# Allegro board PM25_V2-7_150227_02p.brd
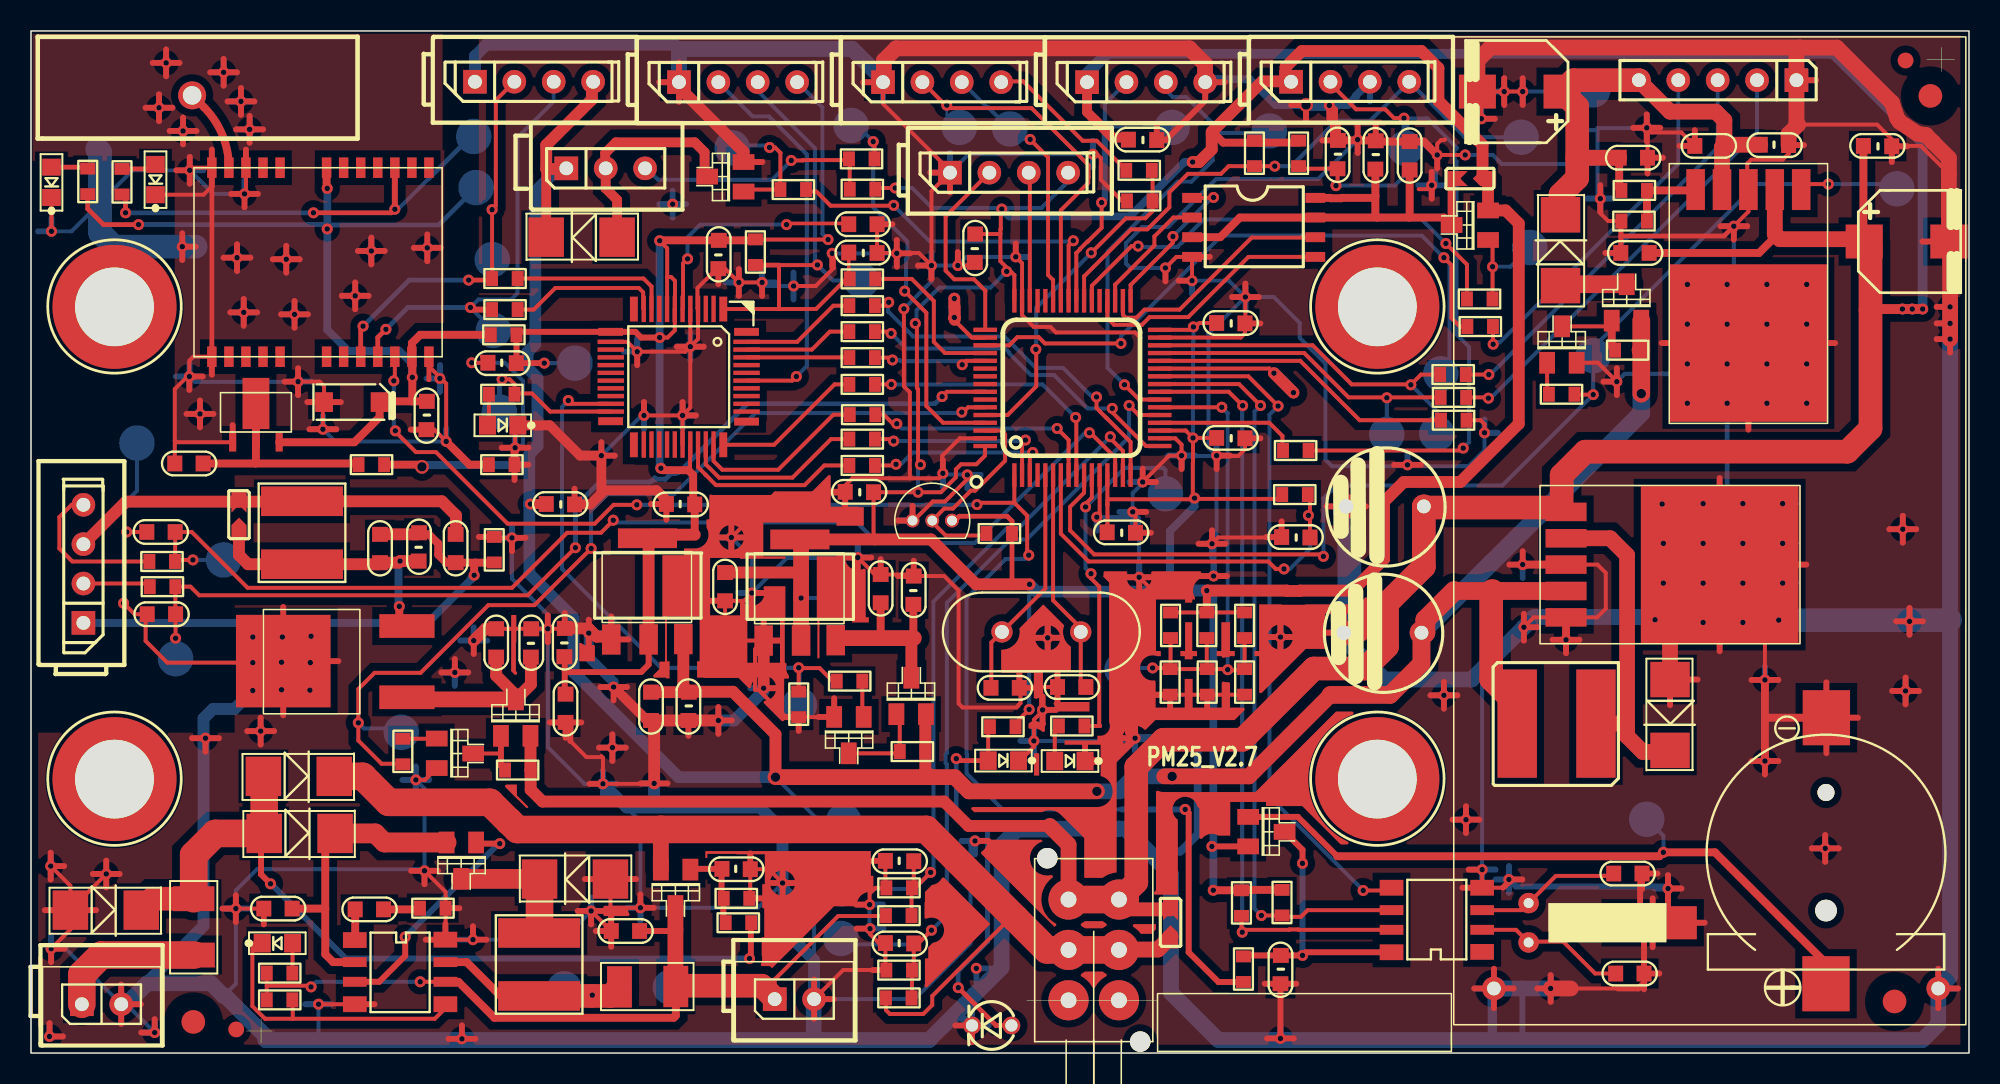
[diagram p0: board, top side]
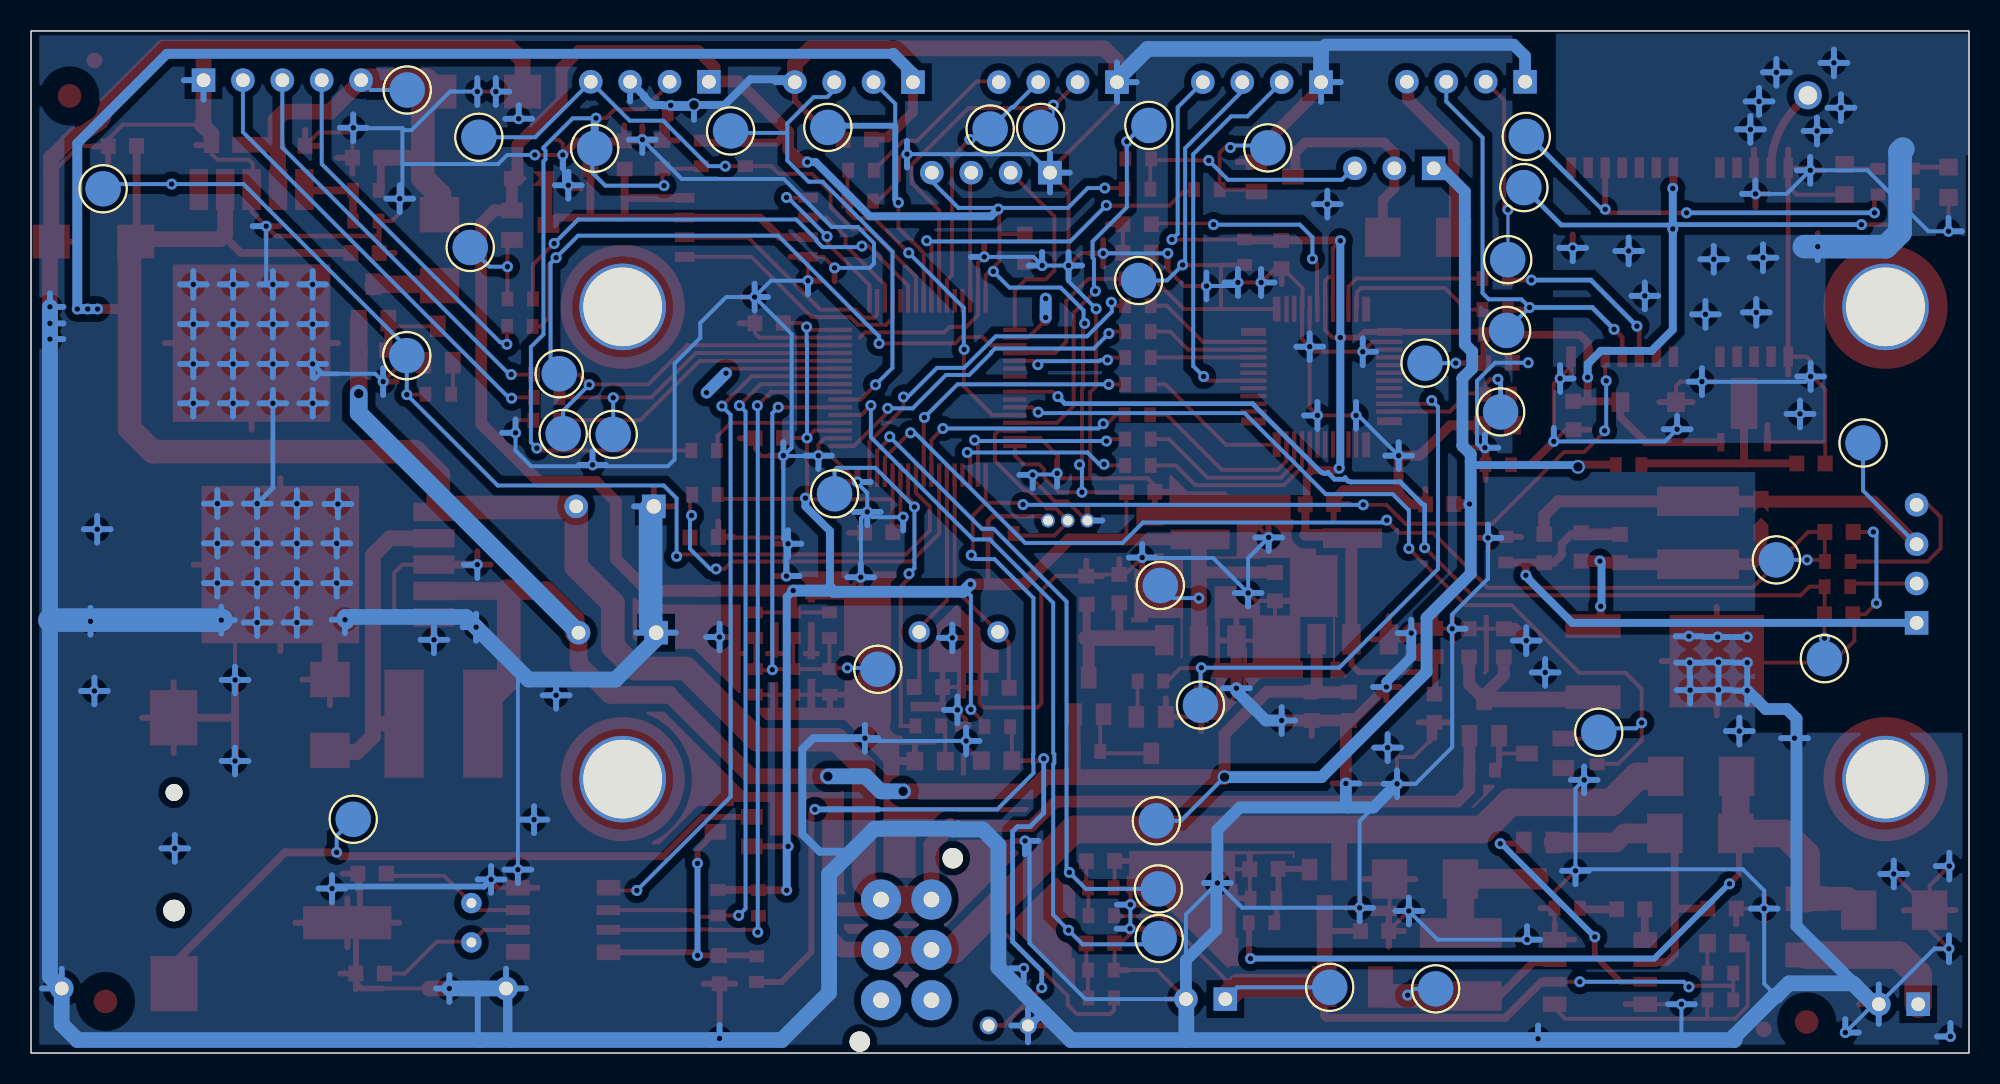
[diagram p1: board, bottom side, seen from below]

Outline 124.97 x 65.96 mm; copper layers: TOP, BOTTOM. Coordinates in mm from the lower left corner of the outline.
Outline path: rectangle 0,0 124.97,65.96

## Placement (name value [footprint] x y rotation side)
BAT  BATTERY  [BATTCR1220]  115.75 12.75 0 top
BAT_8.4V1  8.4v  [HEADER2]  47.96 3.48 0 top
C1  10uF  [C0603]  15.93 9.32 180 top
C2  0.1uF  [C0603_1]  45.47 11.86 0 top
C3  1uF  [C0603]  21.82 9.27 180 top
C4  10uF  [C0603]  38.33 7.87 180 top
C5  15pF  [C0603]  67.11 23.62 180 top
C6  15pF  [C0603]  62.81 23.57 0 top
C7  0.1uf  [C0603_1]  80.57 5.38 270 top
C8  0.1uf  [C0603_1]  81.56 33.3 180 top
C9  5pF  [C0603]  103.1 5.13 0 top
C10  5pF  [C0603]  102.97 11.58 0 top
C11  0.1uf  [C0603_1]  56.01 12.38 0 top
C12  0.1uf  [C0603_1]  77.37 47.12 180 top
C13  0.1uf  [C0603_1]  60.88 51.94 90 top
C15  0.1uf  [C0603_1]  86.69 57.96 270 top
C16  10uF  [C0603]  88.9 57.91 270 top
C17  0.1uf  [C0603_1]  77.37 39.7 180 top
C18  0.1uf  [C0603_1]  70.31 33.6 180 top
C19  1uF  [C0603]  53.64 53.49 0 top
C20  100pf  [C0603]  8.41 28.32 180 top
C21  100pf  [C0603]  8.38 33.63 0 top
C22  0.1uf  [C0603_1]  71.68 58.95 180 top
C23  0.1uf  [C0603_1]  41.88 35.41 0 top
C24  0.1uf  [C0603_1]  30.38 44.53 0 top
C25  0.1uf  [C0603_1]  44.35 51.54 90 top
C26  0.1uf  [C0603_1]  53.64 51.66 180 top
C27  0.1uf  [C0603_1]  84.25 57.99 270 top
C28  0.1uf  [C0603_1]  119.08 58.55 180 top
C29  1000UF  [CAP_POL_DIP_5MM]  87.63 35.71 180 top
C32  NC/0.1uF  [C0603_1]  25.5 41.15 270 top
C33  0.1uf  [C0603_1]  34.14 35.43 180 top
C34  0.1uF  [C0603_1]  56.92 29.87 90 top
C35  10uF  [C0603]  54.79 29.97 270 top
C36  10uF  [C0603]  44.75 30.1 90 top
C37  0.1uF  [C0603_1]  53.42 36.22 180 top
C38  100uf/660X570SMD  [CAPAE660X570L]  118.72 52.37 0 top
C39  1uF  [C0603]  103.43 51.64 180 top
C40  100uf/660X570SMD  [CAPAE660X570L]  98.22 62.05 180 top
C41  100pF  [C0603]  103.33 57.79 0 top
C42  10uF  [C0603]  108.2 58.55 0 top
C43  0.1uF  [C0603_1]  112.42 58.6 0 top
C44  0.1uF  [C0603_1]  42.39 22.38 270 top
C45  10uF  [C0603]  39.98 22.38 90 top
C46  0.1uF  [C0603_1]  34.42 26.49 90 top
C47  10uF  [C0603]  34.47 22.25 90 top
C48  0.1uF  [C0603_1]  32.26 26.47 90 top
C49  10uF  [C0603]  22.5 32.56 270 top
C50  0.1uF  [C0603_1]  25.02 32.66 90 top
C51  1uF  [C0603]  27.38 32.56 270 top
C52  10uF  [C0603]  30 26.47 270 top
C53  0.1uf  [C0603_1]  56.01 7.07 0 top
C55  1000UF  [CAP_POL_DIP_5MM]  87.48 27.56 180 top
C56  NC/10uF  [CAP-A]  20.57 42.01 0 top
CB3  NC/10uF  [C0603]  10.19 38.05 180 top
D1  SMBJ16CA  [B130L]  4.83 9.22 180 top
D2  SS34  [B130L]  17.32 14.17 180 top
D3  SS34  [B130L]  17.27 17.86 180 top
D4  SS34  [B130L]  35.08 11.23 0 top
D5  BAT54C/SOT  [SOT23-3]  79.65 14.27 90 top
D6  SS34  [B130L]  35.51 52.65 0 top
D7  SS34  [B130L]  105.69 21.82 90 top
D8  1N4007/SMA  [B130L]  98.63 51.82 270 top
DC_12  HEADER 2  [HEADER2]  3.28 3.15 0 top
DEBUG_STM8  HEADER 4  [HEADER4]  41.78 62.66 0 top
DEBUG_STM32  HEADER 4  [HEADER4]  59.26 56.82 0 top
F1  FUSE_1A  [F1210]  10.49 8.18 180 top
GPRS  GPRS_Mode  [GPRS_MODE]  113.84 62.79 180 top
GPS1  GPS_BS280_4p  [HEADER4]  28.63 62.69 0 top
GPS_POW  NC/LED  [LED_SMD]  1.32 55.07 180 top
GPS_PPS  NC/LED  [LED_SMD]  8.03 55.25 180 top
HT1  HT1381/SOP8  [SOP8]  93.32 6.68 90 top
J1  HEADER 4  [HEADER4]  81.25 62.69 0 top
J2  NC  [DEBUG0603_V1]  13.41 34.57 90 top
J9  HEADER 4  [HEADER4]  68.1 62.66 0 top
J_SW  NC  [DEBUG0603_V1]  73.48 8.26 90 top
L1  10UH/SMD  [CDRH4D18]  32.77 5.72 0 top
L3  B1  [R0603]  29.87 32.49 270 top
L5  10UH/SMD  [CDRH4D18]  17.48 33.58 0 top
L6  100UH/SMD  [CD75]  98.37 21.26 90 top
L7  FB  [R0603]  21.95 37.97 0 top
L8  NC/FB  [R0603]  30.48 46.36 0 top
L9  FB  [R0603]  30.35 37.97 0 top
LED1  LED  [LED_SMD]  14.76 7.09 90 top
LED_POW1  LED  [LED_SMD]  63.83 18.87 270 top
LED_POW2  LED  [LED_3MM]  63.22 1.78 90 top
MOTO  HEADER2  [HEADER3]  38.33 57.1 0 top
NOREF  -  [unnamed]  122.48 61.77 0 top
NOREF#2  -  [unnamed#2]  5.38 48.16 0 top
NOREF#3  -  [unnamed#2]  86.82 17.68 0 top
NOREF#4  -  [unnamed]  120.17 3.33 0 top
NOREF#5  -  [unnamed]  10.46 2.01 0 top
NOREF#6  -  [unnamed#2]  5.38 17.68 0 top
NOREF#7  -  [unnamed#2]  86.82 48.16 0 top
NOREF#8  -  [unnamed#3]  120.88 64.06 0 top
NOREF#9  -  [unnamed#3]  13.23 1.52 0 top
PPD42_PWM  PPD42  [HEADER4]  3.38 27.76 90 top
Q1  TCS1307  [SOT23-3]  27.74 12.42 0 top
Q2  TCS1307  [SOT23-3]  41.55 10.67 0 top
Q3  NC/SI2306DS  [SOT23-3]  92.79 53.44 270 top
Q4  SI2306DS  [SOT23-3]  44.78 56.57 270 top
Q5  TCS1307  [SOT23-3]  56.77 23.04 180 top
Q6  3904  [SOT23-3]  52.73 20.52 0 top
Q7  TCS1307  [SOT23-3]  31.27 21.64 180 top
Q8  3904  [SOT23-3]  27.33 19.33 90 top
Q9  3904  [SOT23-3]  98.73 45.72 180 top
Q10  TCS1307  [SOT23-3]  102.9 48.44 180 top
R1  10k  [R0603]  16.03 5.16 0 top
R2  510  [R0603]  45.62 8.41 180 top
R3  0.15-2010  [R1210]  39.8 4.29 90 top
R4  51K  [R0603]  45.49 9.98 180 top
R5  510  [R0603]  25.91 9.35 0 top
R6  510  [R0603]  81.56 38.89 180 top
R7  510  [R0603]  49.15 55.73 0 top
R8  10k  [R0603]  81.51 36.04 180 top
R9  510  [R0603]  53.62 49.96 180 top
R10  10k  [R0603]  91.74 40.84 180 top
R11  10k  [R0603]  78.05 9.68 90 top
R12  10k  [R0603]  80.67 9.7 90 top
R13  10K  [R0603]  67.11 21.11 0 top
R14  10K  [R0603]  62.66 21.06 0 top
R15  51K  [R0603]  55.96 8.86 0 top
R16  10k  [R0603]  55.98 10.66 180 top
R17  51K  [R0603]  71.45 56.97 0 top
R18  510  [R0603]  91.72 42.32 0 top
R19  510  [R0603]  91.69 43.79 0 top
R20  510  [R0603]  93.45 46.89 0 top
R21  100k  [R0603]  71.5 54.99 180 top
R22  510  [R0603]  53.59 46.56 0 top
R23  NC/510  [R0603]  93.42 48.67 180 top
R24  510  [R0603]  53.59 48.23 0 top
R25  510  [R0603]  53.59 44.88 0 top
R26  510  [R0603]  53.59 43.15 0 top
R27  510  [R0603]  53.62 41.2 0 top
R28  510  [R0603]  53.59 39.62 0 top
R29  510  [R0603]  53.59 37.92 0 top
R30  510  [R0603]  8.48 30.1 180 top
R31  510  [R0603]  8.46 31.72 180 top
R32  10K  [R0603]  30.35 42.52 0 top
R33  51K  [R0603]  81.74 58.06 90 top
R35  10k  [R0603]  46.71 51.69 90 top
R38  100k  [R0603]  56.85 19.46 180 top
R39  100K  [R0603]  103.38 55.68 0 top
R40  510  [R0603]  52.78 24 0 top
R41  43K  [R0603]  103.38 53.7 180 top
R42  10k  [R0603]  49.5 22.5 90 top
R43  100k  [R0603]  31.39 18.26 180 top
R44  510  [R0603]  23.98 19.46 90 top
R45  510  [R0603]  53.57 57.71 180 top
R46  510  [R0603]  78.18 5.41 90 top
R47  NC  [R0603]  78.89 58.06 90 top
R48  10k  [R0603]  16.03 3.43 0 top
R49  51K  [R0603]  55.96 3.56 0 top
R50  10k  [R0603]  55.98 5.35 180 top
R51  510  [R0603]  30.56 47.98 0 top
R52  510  [R0603]  30.56 49.99 0 top
R53  100k  [R0603]  102.97 45.36 180 top
R54  510  [R0603]  98.7 42.52 180 top
R55  NC/10K  [R0603]  3.66 56.26 270 top
R56  NC/10K  [R0603]  5.87 56.24 270 top
R57  10K  [R0603]  53.62 55.75 180 top
R59  10k  [R0603]  78.26 23.95 270 top
R60  NC  [R0603]  73.46 23.95 270 top
R61  NC  [R0603]  75.84 23.95 270 top
R63  NC  [R0603]  73.48 27.61 270 top
R64  NC  [R0603]  75.82 27.61 270 top
R65  NC  [R0603]  78.26 27.61 270 top
R66  10K  [R0603]  62.43 33.53 0 top
RF_ANT  NC  [GPS_RF_20X6]  10.39 59.31 0 top
STM8_LED1  LED  [LED_SMD]  31.55 40.51 270 top
STM32_LED1  LED  [LED_SMD]  68.12 18.85 270 top
SW  SW  [SW-6]  68.53 3.4 180 top
T1  TEST  [TEST_90C_SMD]  34.39 4.14 180 bottom
T2  TEST  [TEST_90C_SMD]  41.22 4.24 180 bottom
T3  TEST  [TEST_90C_SMD]  52.27 10.59 180 bottom
T4  TEST  [TEST_90C_SMD]  52.22 7.39 180 bottom
T5  TEST  [TEST_90C_SMD]  52.4 14.99 180 bottom
T6  TEST  [TEST_90C_SMD]  52.15 30.18 180 bottom
T7  TEST  [TEST_90C_SMD]  6.83 39.37 180 bottom
T8  TEST  [TEST_90C_SMD]  35.08 44.53 180 bottom
T9  TEST  [TEST_90C_SMD]  100.71 62.15 180 bottom
T10  TEST  [TEST_90C_SMD]  100.74 45.01 180 bottom
T11  TEST  [TEST_90C_SMD]  49.56 22.45 180 bottom
T12  TEST  [TEST_90C_SMD]  23.88 20.7 180 bottom
T13  TEST  [TEST_90C_SMD]  70.36 24.77 180 bottom
T15  TEST  [TEST_90C_SMD]  104.19 15.09 180 bottom
T16  TEST  [TEST_90C_SMD]  73.15 36.09 180 bottom
T17  TEST  [TEST_90C_SMD]  96.65 51.99 180 bottom
T18  TEST  [TEST_90C_SMD]  9.32 25.45 180 bottom
T19  TEST  [TEST_90C_SMD]  12.42 31.83 180 bottom
T20  TEST  [TEST_90C_SMD]  29.82 46.63 180 bottom
T21  TEST  [TEST_90C_SMD]  29.74 51.21 180 bottom
T22  TEST  [TEST_90C_SMD]  45.21 58.42 180 bottom
T23  TEST  [TEST_90C_SMD]  52.88 59.87 180 bottom
T24  TEST  [TEST_90C_SMD]  30.2 41.38 180 bottom
T25  TEST  [TEST_90C_SMD]  96.09 59.11 180 bottom
T26  TEST  [TEST_90C_SMD]  88.62 58.39 180 bottom
T27  TEST  [TEST_90C_SMD]  53.54 49.86 180 bottom
T28  TEST  [TEST_90C_SMD]  120.32 55.78 180 bottom
T29  TEST  [TEST_90C_SMD]  79.86 59.51 180 bottom
T30  TEST  [TEST_90C_SMD]  73.58 59.74 180 bottom
T31  TEST  [TEST_90C_SMD]  87.43 39.93 180 bottom
T32  TEST  [TEST_90C_SMD]  90.65 39.98 180 bottom
T33  TEST  [TEST_90C_SMD]  90.91 43.84 180 bottom
T34  TEST  [TEST_90C_SMD]  59.87 59.74 180 bottom
T35  TEST  [TEST_90C_SMD]  63.12 59.64 180 bottom
T36  TEST  [TEST_90C_SMD]  28.55 59.16 180 bottom
T37  TEST  [TEST_90C_SMD]  28.7 55.85 180 bottom
U1  NC/VK1612U7M3L  [VK1612]  19.38 49.91 90 top
U2  TD8207/SOP8  [SOP8]  21.13 7.14 270 top
U3  STM32F103RB  [LQFP64]  67.16 42.93 90 top
U4  W25Q32SSIG  [SOIC_208MIL_8P]  78.84 53.29 0 top
U5  STM8S007C8  [LQFP48]  41.76 43.66 180 top
U7  LM1117-3V3/SOT223  [SOT-223]  49.58 26.67 0 top
U8  NC/MIC29302  [TO263]  114.15 55.73 180 top
U9  LM1117-3.3V/SOT223  [SOT-223]  39.75 26.75 0 top
U10  78M05  [TO252AA]  22.94 22.96 90 top
U11  LM2596S-5.0/to263  [TO263]  98.98 34.93 270 top
U12  NC/APL5508-33  [SOT89B]  16 39.67 90 top
U13  DS18B20  [TO92]  56.85 34.37 90 top
USART1  HEADER 4  [HEADER4]  54.94 62.66 0 top
W25Q_3V1  NC  [DEBUG0603_V1]  92.96 56.44 180 top
Y1  8M  [9-216M]  62.61 27.18 0 top
Y2  32.768K/32ka-6p  [32KA-3PIN]  96.57 9.68 270 top

## Library data of the parts
BAT = BATTERY_3
BAT_8.4V1 = MX1500
C1-C4 C34-C37 C39 C41-C52 = CAP_0
C5-C10 C19 C26 C32 = CAP NP_4
C11-C13 C15-C18 C20-C25 C27 C28 C33 C53 = C_0
C29 C38 C40 C55 C56 = CAPACITOR POL_0
CB3 = CAP_0.1uF_0603
D1 = DIODE DIAC
D2-D4 = DIODE SCHOTTKY_1
D5 = BAT54C/SOT
D6-D8 = DIODE
DC_12 = HEADER 2_2
DEBUG_STM8 DEBUG_STM32 USART1 = HEADER 4
F1 = FUSE_0
GPRS = CONN RECT 5_3
GPS1 = HEADER 6_2
GPS_POW GPS_PPS LED1 LED_POW1 LED_POW2 STM8_LED1 STM32_LED1 = LED
HT1 = HEADER 5_7
J1 = RESISTOR VAR_4
J2 J_SW L3 W25Q_3V1 = JUMPER_2
J9 = HEADER 4_1
L1 L5-L9 = INDUCTOR_0
MOTO = HEADER 5_5
PPD42_PWM = HEADER 5_1
Q1-Q3 Q5 Q7 Q10 = FDC634P_4
Q4 = MOSFET_I_EN_0
Q6 Q8 Q9 = NPN_0
R1 R2 R4 R48 = RESISTOR_2
R3 R5 R39 R41 = R
R6-R12 R15-R31 R33 R35 R38 R40 R42-R44 R46 R49-R56 R59-R61 R63-R65 = RESISTOR_0
R13 R14 R32 R45 R47 R57 R66 = R_0
RF_ANT T1-T13 T15-T37 = TESTPONT
SW = CON2_11
U1 = VK1612U7M3L
U2 = BQ2057CTS_0
U3 = STM32F103_2
U4 = W25Q32: User Part Number: ***; Tolerance: ***
U5 = STM8S007C8
U7 U9 = 1117-3.3
U8 = CY7C68013A-100_2
U10 U12 = CY7C68013A-100_3
U11 = LM2596_TO-263_0
U13 = DS1820_0
Y1 = CRYSTAL_2
Y2 = CRYSTAL_1

## Footprints (pads in the part's own frame, mm; a bottom-side part is the same pattern mirrored in y, then rotated)
9-216M
  round 1.372 hole 0.889: 1(0,0) 2(5.08,0)
32KA-3PIN
  round 1.321 hole 0.635: 1(0,0) 2(2.54,0)
  rect 2.134x5.69 smd: 3(1.27,8)
B130L
  rect 2.286x2.54 smd: 1(2.286,0) 2(-2.286,0)
BATTCR1220
  round 1.397 hole 1.397 unplated: (0,-3.556)
  rect 3.048x3.556 smd: 1(0,-8.28) 2(0.025,8.89)
  round 1.092 hole 1.092: 3(0,4.064)
C0603
  rect 0.965x1.016 smd: 1(-0.914,0) 2(0.914,0)
C0603_1
  rect 0.965x1.016 smd: 1(-0.914,0.025) 2(0.914,0)
CAP-A
  rect 1.143x1.27 smd: 1(1.905,0) 2(-1.676,0)
CAP_POL_DIP_5MM
  round 1.524 hole 0.889: 1(-2.184,0.432)
  rect 1.524x1.524 hole 0.94: 2(2.819,0.432)
CAPAE660X570L
  rect 2.388x2.184 smd: 1(-0.508,0) 2(4.953,0)
CD75
  rect 6.985x2.54 smd: 1(0,2.54) 2(0,-2.54)
CDRH4D18
  rect 5.283x1.905 smd: 1(0,2.032) 2(0,-2.032)
DEBUG0603_V1
  custom 1.499x0.965 smd: 1(-0.762,0)
  custom 1.397x0.965 smd: 2(1.016,0)
F1210
  rect 2.667x1.6 smd: 1(-0.025,1.854) 2(0,-1.778)
GPRS_MODE
  rect 1.524x1.524 hole 0.889: 1(0,0)
  round 1.524 hole 0.889: 2(2.54,0) 3(5.08,0) 4(7.62,0) 5(10.16,0) 6(-9.144,58.623) 7(19.507,58.623)
GPS_RF_20X6
  round 1.803 hole 1.194: 1(0,2.5)
HEADER2
  rect 1.524x1.524 hole 0.889: 1(0,0)
  round 1.524 hole 0.889: 2(2.54,0)
HEADER3
  rect 1.524x1.524 hole 0.889: 1(-3.81,0)
  round 1.524 hole 0.889: 2(-1.27,0) 3(1.27,0)
HEADER4
  rect 1.524x1.524 hole 0.889: 1(0,0)
  round 1.524 hole 0.889: 2(2.54,0) 3(5.08,0) 4(7.62,0)
LED_3MM
  round 1.143 hole 0.787: 1(0,0) 2(0,2.54)
LED_SMD
  rect 1.194x1.092 smd: 1(0,-2.108) 2(0,-0.152)
LQFP48
  rect 0.508x1.6 smd: 1(-2.883,-4.356) 12(2.883,-4.356) 25(2.883,4.407) 36(-2.883,4.407)
  rect 0.279x1.702 smd: 2(-2.255,-4.364) 3(-1.755,-4.364) 4(-1.255,-4.364) 5(-0.757,-4.364) 6(-0.256,-4.364) 7(0.244,-4.364) 8(0.744,-4.364) 9(1.245,-4.364) 10(1.745,-4.364) 11(2.245,-4.364) 26(2.245,4.389) 27(1.745,4.389) 28(1.245,4.389) 29(0.744,4.389) 30(0.244,4.389) 31(-0.256,4.389) 32(-0.757,4.389) 33(-1.255,4.389) 34(-1.755,4.389) 35(-2.255,4.389)
  rect 1.6x0.508 smd: 13(4.381,-2.883) 24(4.381,2.883) 37(-4.381,2.908) 48(-4.381,-2.883)
  rect 1.702x0.279 smd: 14(4.371,-2.238) 15(4.371,-1.737) 16(4.371,-1.237) 17(4.371,-0.737) 18(4.371,-0.236) 19(4.371,0.264) 20(4.371,0.762) 21(4.371,1.262) 22(4.371,1.763) 23(4.371,2.263) 38(-4.384,2.263) 39(-4.384,1.763) 40(-4.384,1.262) 41(-4.384,0.762) 42(-4.384,0.264) 43(-4.384,-0.236) 44(-4.384,-0.737) 45(-4.384,-1.237) 46(-4.384,-1.737) 47(-4.384,-2.238)
LQFP64
  rect 1.524x0.279 smd: 1(-5.626,3.749) 2(-5.626,3.251) 3(-5.626,2.751) 4(-5.626,2.25) 5(-5.626,1.75) 6(-5.626,1.25) 7(-5.626,0.749) 8(-5.626,0.249) 9(-5.626,-0.249) 10(-5.626,-0.749) 11(-5.626,-1.25) 12(-5.626,-1.75) 13(-5.626,-2.25) 14(-5.626,-2.751) 15(-5.626,-3.251) 16(-5.626,-3.749) 33(5.626,-3.749) 34(5.626,-3.251) 35(5.626,-2.751) 36(5.626,-2.25) 37(5.626,-1.75) 38(5.626,-1.25) 39(5.626,-0.749) 40(5.626,-0.249) 41(5.626,0.249) 42(5.626,0.749) 43(5.626,1.25) 44(5.626,1.75) 45(5.626,2.25) 46(5.626,2.751) 47(5.626,3.251) 48(5.626,3.749)
  rect 0.279x1.524 smd: 17(-3.749,-5.626) 18(-3.251,-5.626) 19(-2.751,-5.626) 20(-2.25,-5.626) 21(-1.75,-5.626) 22(-1.25,-5.626) 23(-0.749,-5.626) 24(-0.249,-5.626) 25(0.249,-5.626) 26(0.749,-5.626) 27(1.25,-5.626) 28(1.75,-5.626) 29(2.25,-5.626) 30(2.751,-5.626) 31(3.251,-5.626) 32(3.749,-5.626) 49(3.749,5.626) 50(3.251,5.626) 51(2.751,5.626) 52(2.25,5.626) 53(1.75,5.626) 54(1.25,5.626) 55(0.749,5.626) 56(0.249,5.626) 57(-0.249,5.626) 58(-0.749,5.626) 59(-1.25,5.626) 60(-1.75,5.626) 61(-2.25,5.626) 62(-2.751,5.626) 63(-3.251,5.626) 64(-3.749,5.626)
R0603
  rect 0.762x0.965 smd: 1(-0.826,0) 2(0.826,0)
R1210
  rect 2.667x1.6 smd: 1(-0.025,1.854) 2(0,-1.778)
SOIC_208MIL_8P
  rect 1.27x0.635 smd: 1(-3.975,1.905) 2(-3.975,0.635) 3(-3.975,-0.635) 4(-3.975,-1.905) 5(3.975,-1.905) 6(3.975,-0.635) 7(3.975,0.635) 8(3.975,1.905)
SOP8
  rect 1.016x1.524 smd: 1(-0.152,-0.254) 4(3.988,-0.254) 5(3.988,5.588) 8(-0.178,5.588)
  rect 0.635x1.524 smd: 2(1.27,-0.254) 3(2.54,-0.254) 6(2.54,5.588) 7(1.27,5.588)
SOT23-3
  rect 1.016x1.397 smd: 1(0.965,1.168) 2(-0.94,1.168) 3(0,-1.181)
SOT89B
  rect 1.194x0.457 smd: 1(-0.254,2.997) 3(-0.254,0)
  custom 4.496x1.727 smd: 2(1.651,1.499)
SOT-223
  rect 1.194x1.956 smd: 1(-2.337,-0.051) 2(0.076,-0.051) 3(2.311,-0.025)
  rect 3.81x1.27 smd: 4(0,6.477)
SW-6
  round 1.321 hole 1.321 unplated: (-2.997,2.667) (2.997,-9.169)
  round 2.591 hole 1.016: 1(-1.626,0) 2(1.626,0) 3(-1.626,-3.251) 4(1.626,-3.251) 5(-1.626,-6.502) 6(1.626,-6.502)
TEST_90C_SMD
  round 2.286 smd: 1(0,0)
TO92
  round 0.889 hole 0.635: 1(0,0) 2(0,-1.27) 3(0,-2.54)
TO252AA
  rect 1.524x3.556 smd: 1(-0.004,-1.304) 3(4.596,-1.304)
  rect 5.969x6.096 smd: 2(2.332,6.673)
TO263
  rect 1.194x2.642 smd: 1(0,0) 2(1.702,0) 3(3.404,0) 4(5.105,0) 5(6.807,0)
  rect 10.16x10.16 smd: 6(3.404,9.906)
unnamed
  round 1.524 smd: 1(0,0)
unnamed#2
  round 8.001 hole 5.08: 1(0,0)
unnamed#3
  round 1.016 smd: 1(0,0)
VK1612
  rect 1.321x0.61 smd: 1(7.23,-6.28) 2(7.23,-5.18) 3(7.23,-4.08) 4(7.23,-2.98) 5(7.23,-1.88) 6(7.23,-0.78) 7(7.23,0.32) 8(7.23,3.32) 9(7.23,4.42) 10(7.23,5.52) 11(7.23,6.62) 12(7.23,7.72) 13(-4.97,7.72) 14(-4.97,6.62) 15(-4.97,5.52) 16(-4.97,4.42) 17(-4.97,3.32) 18(-4.97,0.32) 19(-4.97,-0.78) 20(-4.97,-1.88) 21(-4.97,-2.98) 22(-4.97,-4.08) 23(-4.97,-5.18) 24(-4.97,-6.28)

## Nets
GND: BAT.2(-) BAT_8.4V1.2(-) C1.2 C2.2 C4.2 C5.2 C6.2 C7.2 C8.2 C9.2 C10.2 C11.1 C12.1 C13.1 C15.1 C16.1 C17.1 C18.1 C19.2 C20.2 C21.1 C22.1 C23.1 C24.1 C25.1 C26.1 C27.1 C28.1 C29.2 C33.1 C34.2 C35.1 C36.1 C37.2 C38.2 C39.2 C40.2 C41.2 C42.1 C43.2 C44.2 C45.1 C46.2 C47.1 C48.2 C52.1 C53.1 C55.2 D1.1 D4.1 D7.1 DC_12.2(GND) DEBUG_STM8.1 DEBUG_STM32.1 GPRS.1(GND) GPRS.6(NC1) GPRS.7(NC2) GPS1.1(GND) HT1.4(GND) J1.3(B) J9.4 L3.1 L9.2 LED_POW1.2(CATHODE) LED_POW2.2(CATHODE) Q4.2(S) Q6.2 Q8.2 Q9.2 R4.1 R5.2 R10.1 R16.2 R21.2 R41.2 R42.1 R50.2 R59.2 R60.2 R61.2 STM8_LED1.2(CATHODE) STM32_LED1.2(CATHODE) U2.4(GND) U2.8(NTC) U3.12(VSSA) U3.18(VSS_4) U3.31(VSS_1) U3.47(VSS_2) U3.63(VSS_3) U4.4(GND) U5.4(VSSIO_1) U5.5(VSS) U5.14(VSSA) U5.31(VSSIO_2) U7.1 U8.3(GND) U8.6(GND1) U9.1 U10.2(GND) U11.3(GND) U11.5(ON~/OFF) U11.6(TAB) U13.1(GND) USART1.1 Y2.3
GND_GPS: C32.2 C56.2 CB3.2 GPS_POW.2(CATHODE) GPS_PPS.2(CATHODE) L9.1 U1.10(GND1) U1.12(GND2) U1.13(GND3) U1.24(GND) U12.1(GND)
GND_PPD42: C49.1 C50.2 C51.2 L3.2 PPD42_PWM.1(GND)
VCC_3V3: C12.2 C13.2 C17.2 C18.2 C36.2 C37.1 D5.2(C2) DEBUG_STM32.4 J1.1(A) Q3.2(S) R8.2 R11.2 R12.2 R14.2 R33.2 R47.2 R57.1 R63.1 R64.1 R65.1 R66.2 T6.1 U3.13(VDDA) U3.19(VDD_4) U3.32(VDD_1) U3.48(VDD_2) U3.64(VDD_3) U7.2(OUT) U7.4 U13.3(VDD) W25Q_3V1.1
VCC_5V: C33.2 C44.1 C45.2 C55.1 D6.2 GPS1.4(VCC) L6.1 L7.2 MOTO.1 Q5.2(S) Q10.2(S) R38.1 R53.1 T5.1 U9.3(IN) U11.4(FB)
VCC_BAT: C22.2 C28.2 C29.1 C38.1 C39.1 J9.1 J_SW.2 Q7.2(S) R43.1 SW.5 SW.6 U8.2(VIN) U11.1(VIN)
VCC_GPRS: C40.1 C41.1 C42.2 C43.1 D8.2 GPRS.5(VCC) R39.1 T9.1 U8.4(VOUT)
VCC_GPS_3V3: C32.1 C56.1 L8.1 R55.2 T37.1 U1.7(VDDUSB) U1.23(VCC) U12.3(OUT)
VCC_PPD42: C51.1 J2.2 L5.1 PPD42_PWM.3(VDD_5V) T7.1
VCC_RTC_BAT: R46.1 U1.22(V_BCKP) U3.1(VBAT)
VCC_STM8: C23.2 C24.2 C25.2 C46.1 C47.2 DEBUG_STM8.4 L8.2 R35.2 T8.1 U5.7(VDD) U5.8(VDDIO_1) U5.13(VDDA) U5.32(VDDIO-2) U9.2(OUT) U9.4
3.3IO-EN: R40.1 R42.2 T11.1 U5.22(TIM1-CH1N/AIN0/PB0)
8INT-IN-PC0: R27.2 U3.8(PC0/ADC12_IN10)
8INT-IN-PC1: R26.2 U3.9(PC1/ADC12_IN11)
8LED: R32.2 T24.1 U5.23(AIN8/PE7)
8UART1-RX-PA4: R52.2 U5.10(UART1_RX/(HS)PA4)
8UART1-TX-PA5: R51.2 U5.11(UART1_TX/(HS)PA5)
32-U2-RX-PA3: R22.2 U3.17(PA3/USART2_RX/ADC12_IN3/TIM2_CH)
32-U2-TX-PA2: R24.2 U3.16(PA2/USART2_TX/ADC12_IN2/TIM2_CH)
BAT_8.4V: BAT_8.4V1.1(+) C4.1 Q2.3(D1) R1.1 R3.2 R15.1 R48.1 T2.1 U2.6(BAT)
BOOT: U1.16(CFG_GPS0)
BOOT0: R17.2 R21.1 U3.60(BOOT0)
BOOT1: R10.2 U3.28(PB2/BOOT1)
CO2_ADC_PA7: J9.3 T29.1 U3.23(PA7/SPI1_MOSI/ADC12_IN7/TIM3_CH)
DHT11_DATA_PC9: J9.2 T30.1 U3.40(PC9/TIM3_CH4)
DS18B20_PB9: R66.1 U3.62(PB9/I2C1_SDA/CANTX) U13.2(DQ)
GPRS-KEY-PC10: R20.1 T33.1 U3.51(PC10)
GPRSIO-EN: R54.1 T10.1 T28.1 U3.10(PC2/ADC12_IN12) U8.1(ON/OFF)
GPS_UART_RX: GPS1.3(RXD) R51.1 T20.1 U1.21(RXD1)
GPS_UART_TX: GPS1.2(TXD) R52.1 T21.1 U1.20(TXD1)
LED1-PC3: R13.2 T16.1 U3.11(PC3/ADC12_IN13)
MOTO-EN-PC12: R25.2 U3.53(PC12)
MOTO_PWM_ADC: C27.2 J1.2(WIPER) R6.1 R33.1 T26.1
MOTO_PWM_INPUT: R45.1 T23.1 U3.61(PB8/I2C1_SCL/CANRX)
MOTO_PWM_OUT: Q4.1(G) R7.1 T22.1
PA0_TIM2_CH1: C21.2 R31.1 T19.1 U3.14(PA0-WKUP/USART2_CTS/ADC12_IN0/T)
PB5_TIM3_CH2: C20.1 R30.1 T18.1 U3.57(PB5/I2C1_SMBAL/TIM3_CH2/SPI1_MO)
POWEADC-PA1: C11.2 R15.2 R16.1 T3.1 U3.15(PA1/USART2_RTS/ADC12_IN1/TIM2_C)
POWEADC-PA5: C53.2 R49.2 R50.1 T4.1 U3.21(PA5/SPI1_SCK/ADC12_IN5)
PPD42IO-EN: R44.1 T12.1 U3.59(PB7/I2C1_SDA/USART1_RX)
PPS: R56.2 T36.1 U1.3(TIMEPULSE)
RTC_CLK: HT1.7(CLK) R11.1 U3.24(PC4/ADC12_IN14)
RTC_DATA: HT1.6(DATA) R12.1 U3.25(PC5/ADC12_IN15)
RTC_RST: HT1.5(RST) U3.26(PB0/ADC12_IN8/TIM3_CH3/TIM1_CH2)
SF-CS-PB12: U3.33(PB12/TIM1_BKIN/SPI2_NSS) U4.1(C\S\)
SF-MISO-PB14: U3.35(PB14/TIM1_CH2N/SPI2_MISO) U4.2(DO(IO1))
SF-MOSI-PB15: U3.36(PB15/TIM1_CH3N/SPI2_MOSI) U4.5(DI(IO0))
SF-SCK-PB13: U3.34(PB13/TIM1_CH1N/SPI2_SCK) U4.6(CLK)
STM8NRST: C26.2 DEBUG_STM8.3 R9.2 R35.1 T27.1 U5.1(NRST)
STM32_PC8: J1.4(C) R47.1 T25.1 U3.39(PC8/TIM3_CH3)
STM32_PC13_STM8_PC7: R28.2 U3.2(PC13-TAMPER-RTC)
STM32_PC14_STM8_PC6: R29.2 U3.3(PC14-OSC32_IN)
SWCLK: DEBUG_STM32.2 U3.49(PA14/JTCK/SWCLK)
SWDIO: DEBUG_STM32.3 U3.46(PA13/JTMS/SWDIO)
SYSWIM: DEBUG_STM8.2 U5.42(PD1(HS)/SYSWIM)
USART1RX-PA10: T35.1 U3.43(PA10/USART1_RX/TIM1_CH3) USART1.3
USART1TX-PA9: T34.1 U3.42(PA9/USART1_TX/TIM1_CH2) USART1.2
USART3-RXD-PB11: R19.1 T32.1 U3.30(PB11/TIM2_CH4/USART3_RX)
USART3-TXD-PB10: R18.1 T31.1 U3.29(PB10/TIM2_CH3/USART3_TX)
W25Q_3.3V: C15.2 C16.2 Q3.3(D1) U4.3(W\P\(IO2)) U4.7(H\O\L\D\(IO3)) U4.8(VCC) W25Q_3V1.2
W25Q_EN: R23.2 U3.38(PC7/TIM3_CH2)
N119571: C5.1 U3.6(PD1 OSC_OUT/CANTX) Y1.2
N119619: C6.1 U3.5(PD0 OSC_IN/CANRX) Y1.1
N122095: R17.1 USART1.4
N124596: GPRS.4(POW_K) R20.2
N124600: GPRS.3(TXD) R19.2
N124604: GPRS.2(RXD) R18.2
N131273: C19.1 U5.6(VCAP)
N140644: R24.1 U5.47(PD6/UART3-RX)
N140648: R22.1 U5.46(PD5/UART3-TX)
N142955: PPD42_PWM.2(OUT2) R30.2
N142959: PPD42_PWM.4(OUT1) R31.2
N147027: R27.1 U5.35(PG0)
N147228: D6.1 MOTO.2 Q4.3(D)
N148723: R26.1 U5.36(PG1)
N149717: C48.1 C52.2 Q7.3(D1) U10.1(IN)
N157719: Q7.1(G) Q8.3 R43.2
N157771: Q8.1 R44.2
N232423: R9.1 U3.52(PC11)
N234544: C8.1 R8.1 U3.7(NRST)
N249329: C49.2 C50.1 J2.1 L5.2 U10.3(OUT)
N256258: R25.1 U5.45(PD4(HS)/TIM2-CH1)
N256475: R28.1 U5.34(PC7(HS)/SPI-MISO)
N256483: R29.1 U5.33(PC6(HS)/SPI-MOSI)
N264294: LED_POW1.1(ANODE) LED_POW2.1(ANODE) R14.1
N273733: R6.2 U3.20(PA4/SPI1_NSS/USART2_CK/ADC12_IN)
N273856: R7.2 U3.41(PA8/USART1_CK/TIM1_CH1/MCO)
N281672: BAT.1(+) D5.1(C1) T15.1
N282213: C7.1 D5.3(A) HT1.8(VCC) R46.2
N283656: C9.1 HT1.2(X1) Y2.2
N283708: C10.1 HT1.3(X2) Y2.1
N289652: Q5.1(G) Q6.3 R38.2
N289700: Q6.1 R40.2
N289920: C34.1 C35.2 Q5.3(D1) U7.3(IN)
N325617: LED1.1(ANODE) R1.2
N325621: LED1.2(CATHODE) R48.2 U2.5(CHRG)
N325625: C2.1 Q2.1(G) R2.2 R4.2
N325629: D1.2 D2.1 D3.1 F1.2 R2.1
N325821: L1.2 R3.1 T1.1 U2.7(SENSOR)
N325825: Q1.1(G) U2.3(GAT)
N325829: D4.2 L1.1 Q1.3(D1)
N325837: C1.1 D2.2 Q1.2(S) U2.2(VCC)
N325845: C3.2 U2.1(COMP)
N325849: D3.2 J_SW.1 Q2.2(S) R49.1 SW.3 SW.4
N351280: MOTO.3 R45.2 R57.2
N1416770: R13.1 STM32_LED1.1(ANODE)
N2480580: R32.1 STM8_LED1.1(ANODE)
N3286430: C3.1 R5.1
N16706137: GPS_POW.1(ANODE) R55.1
N16706179: GPS_PPS.1(ANODE) R56.1
N16708984: CB3.1 L7.1 U12.2(IN)
N16709816: RF_ANT.1 U1.11(RF_IN)
N16778665: DC_12.1(DC) F1.1
N16788183: D7.2 L6.2 U11.2(VOUT)
N16792494: Q9.3 Q10.1(G) R53.2
N16792518: Q9.1 R54.2
N16792540: D8.1 Q10.3(D1)
N16810013: R59.1 R60.1 R61.1 R63.2 R64.2 R65.2 T13.1 U3.22(PA6/SPI1_MISO/ADC12_IN6/TIM3_CH)
N16816895: R39.2 R41.1 U8.5(FB)
N16831266: Q3.1(G) R23.1 T17.1
N16844045: U3.54(PD2/TIM3_ETR)

Pads without a net: BAT 3; HT1 1; NOREF 1; NOREF#2 1; NOREF#3 1; NOREF#4 1; NOREF#5 1; NOREF#6 1; NOREF#7 1; NOREF#8 1; NOREF#9 1; SW 1 2; U1 1 2 4 5 6 8 9 14 15 17 18 19; U3 4 27 37 44 45 50 55 56 58; U5 2 3 9 12 15 16 17 18 19 20 21 24 25 26 27 28 29 30 37 38 39 40 41 43 44 48

## Via types
v1: diameter 0.711, hole 0.356, TOP to BOTTOM, 309 vias
v2: diameter 0.889, hole 0.61, TOP to BOTTOM, 6 vias

## Routing (per net, layer and track width the routed paths; a pad name or vN(x,y) marks a point on that pad's centre or on a via; arc(x,y) is an arc through that point)
GND: length 1979.2
  TOP w0.254: L3.1 29.93,33.25 v1(31.01,33.25) ; v1(42.01,41.15) 42.51,41.65 v1(42.51,45.59) ; v1(42.01,41.15) U5.31 ; v1(42.01,41.15) v1(39.52,41.15) ; STM8_LED1.2 31.22,40.34 v1(31.22,39.07) ; 55.15,5.36 52.37,5.36 BAT_8.4V1.2 ; 55.15,5.36 R50.2 ; 55.15,5.36 55.09,5.41 C53.1 54.68,7.1 54.1,7.67 v1(54.1,8.03) ; 2.54,9.25 2.54,10.8 v1(1.27,12.07) ; 2.54,9.25 D1.1 2.54,7.98 v1(1.3,6.73) ; 2.54,9.25 v1(4.85,11.56) ; 71.53,46.18 71.2,46.51 66.09,46.51 65.74,46.86 64.67,46.86 63.91,47.63 U3.47 63.91,50.98 v1(63.5,51.38) ; v1(42.51,45.59) 43.01,46.09 U5.4 42.98,48.06 42.98,49.38 44.22,50.62 C25.1 44.75,50.62 v1(45.64,49.73) v1(47.14,49.73) ; v1(42.51,45.59) U5.5 ; v1(42.51,45.59) 42.19,45.26 v1(39.09,45.26) 38.45,45.9 U5.14 ; C52.1 C48.2 v1(33.32,27.38) 34.39,27.38 C46.2 ; v1(24.82,17.63) 25.4,17.63 Q8.2 ; 65.13,22.15 65.05,22.15 65.05,21.89 64.67,21.51 v1(64.67,20.14) 64.67,19.76 63.78,18.87 LED_POW1.2 ; 65.13,22.15 65.18,22.15 65.32,22.29 65.35,22.29 65.14,22.51 65.14,23.54 ; 65.13,22.15 65.13,22.15 v1(65.23,22.15) ; v1(45.16,33.27) 48.01,36.12 52.4,36.12 C37.2 52.5,36.63 52.97,37.09 56.67,37.09 ; v1(112.7,27.94) 111.81,27.05 v1(111.81,24.08) ; 29.07,44.94 C24.1 v1(28.42,44.55) ; v1(5.97,29.03) 6.68,28.32 C20.2 7.39,28.22 7.39,26.59 8.79,25.2 v1(14.3,25.2) ; 89.48,55.75 90.07,55.75 v1(90.32,56.01) ; v1(60.38,37.31) 60.38,37.03 58.94,35.6 58.15,35.6 56.92,34.37 U13.1 ; C6.2 63.76,23.54 ; 63.76,23.54 63.8,23.5 63.8,22.59 63.68,22.46 63.68,22.43 63.55,22.3 60.07,22.3 59.82,22.56 59.82,29.85 58.88,30.78 C34.2 56.82,30.89 C35.1 54.41,30.89 v1(53.31,31.98) ; 63.76,23.54 65.14,23.54 ; v1(49.17,49.5) 50.6,49.5 51.77,50.67 51.77,51.51 v1(51.66,51.61) ; v1(76.45,38.56) 76.48,38.53 77.85,38.53 78.28,38.96 C17.1 ; C1.2 v1(13.21,9.32) ; 123.67,56.74 121.87,58.55 120.02,58.55 C28.1 119.99,58.98 119.05,59.92 113.94,59.92 ; U2.4 v1(18.54,3.15) ; C19.2 C26.1 55.37,51.64 ; U3.12 68.91,34.77 v1(68.73,34.59) 68.73,34.4 68.91,34.58 ; 55.37,51.64 57.25,51.64 v1(58.06,50.83) 58.06,55.63 DEBUG_STM32.1 59.26,56.95 54.94,61.26 USART1.1 ; 55.37,51.64 55.4,51.61 v1(55.83,51.61) ; v1(92.48,57.96) v1(90.68,57.96) 90.68,58.67 90.93,58.93 91.14,58.93 91.19,58.98 ; 34.77,20.14 35.81,19.1 36.73,19.1 36.78,19.15 36.88,19.05 v1(36.88,17.37) 40.16,17.37 v1(40.18,17.4) ; C18.1 71.22,34.75 v1(71.04,34.93) ; D4.1 37.36,9.37 ; 37.36,9.37 37.36,7.92 ; 37.36,9.37 v1(39.29,9.37) ; v1(28.5,7.32) U2.8 26.73,7.33 R5.2 26.73,10.4 v1(25.37,11.76) ; C39.2 102.55,51.68 R41.2 101.7,53.7 101.24,54.15 101.24,55.09 v1(101.19,55.14) ; 37.36,7.92 C4.2 ; 37.36,7.92 v1(36.12,9.17) ; v1(68.48,58.01) 68.73,58.01 68.99,57.76 68.99,56.36 70.36,54.99 R21.2 ; 65.14,23.54 65.22,23.62 C5.2 ; 103.76,10.94 103.76,11.46 C10.2 ; v1(104.19,59.72) 104.24,59.66 ; 104.24,59.66 104.5,59.41 106.43,59.41 C42.1 ; 104.24,59.66 C41.2 ; U3.18 73.79,39.67 74.19,39.27 v1(74.19,38.56) 73.39,38.56 v1(71.69,36.85) ; 56.67,37.09 56.67,37.69 56.67,37.69 56.67,38.26 56.67,38.26 56.67,42.64 56.29,43.03 v1(56.29,48.03) ; 56.67,37.09 58.55,37.09 58.8,37.35 v1(58.8,37.41) 58.75,37.47 58.75,38.53 59.89,39.67 U3.63 ; Q6.2 51.78,21.68 R42.1 49.44,21.74 48.62,21.74 46.91,23.44 46.69,23.44 46.69,26.06 U7.1 46.05,26.62 44.75,27.91 C36.1 45.97,29.18 v1(46.48,29.69) ; v1(93.73,40.03) 93.73,40.59 93.47,40.84 R10.1 ; v1(78.31,48.79) 78.31,47.12 C12.1 78.28,46.46 78,46.18 U3.31 ; R59.2 R61.2 R60.2 73.4,23.07 70.82,23.07 70.76,23.13 70.76,25.81 72.09,27.13 72.09,30.08 v1(71.46,30.71) ; v1(59.77,50.83) 60.66,50.83 C13.1 ; C43.2 113.33,58.04 112.95,57.66 110.92,57.66 110.67,57.4 110.67,55.8 U8.3 110.74,54.31 v1(109.8,53.37) ; R4.1 46.38,10.05 C2.2 47.57,11.86 v1(48.46,10.97) ; v1(76.16,32.87) 76.56,33.27 80.62,33.27 C8.2 ; v1(74.87,49.85) U4.4 73.86,51.38 v1(73.15,50.67) ; v1(96.19,62.05) v1(95,62.05) C40.2 93.27,61.19 93.52,60.93 v1(93.52,60.3) ; U11.3 101.02,31.52 101.55,30.99 101.55,28.68 100.99,28.12 U11.5 96.9,28.12 v1(96.27,27.48) ; C21.1 v1(6.17,33.63) ; Q9.2 101.04,44.55 v1(102.26,43.33) ; v1(93.57,11.84) HT1.4 94.92,10.67 ; C11.1 55.09,10.72 R16.2 54.45,10.66 54.08,10.29 v1(54.08,9.58) ; 99.29,4.17 102.34,4.17
  TOP w0.305: 102.51,52.73 109.17,52.73 v1(109.8,53.37) ; 102.51,52.73 102.51,53.66 R41.2 ; 102.51,52.73 C39.2
  TOP w0.381: 25.45,7.32 U2.8 26.72,8.33 ; v1(105.56,10.62) 106.43,10.62 ; v1(105.56,10.62) 105.56,9.4 Y2.3 ; v1(105.56,10.62) 105.56,11.48 ; 109.8,52.5 v1(109.8,53.37) ; v1(109.8,53.37) 110.67,53.37 ; v1(109.8,53.37) 108.94,53.37 ; 40.97,34.42 C23.1 39.98,35.43 ; 72.59,59.94 C22.1 73.18,58.93 75.72,61.47 J9.4 ; 35.71,11.23 D4.1 39.01,11.23 ; v1(92.53,15.06) 92.53,15.93 ; v1(92.53,15.06) 93.4,15.06 ; v1(92.53,15.06) 92.53,14.2 ; v1(92.53,15.06) 91.67,15.06 ; 50.5,2.21 BAT_8.4V1.2 ; BAT_8.4V1.2 51.77,3.48 ; BAT_8.4V1.2 50.5,4.75 ; STM32_LED1.2 67.97,19.95 ; 37.41,28.18 U9.1 38.52,26.7 ; 85.55,59.82 v1(85.55,58.95) 85.55,58.09 ; 55.83,50.75 v1(55.83,51.61) ; v1(55.83,51.61) 56.69,51.61 ; v1(55.83,51.61) 55.83,52.48 ; v1(120.88,23.37) 121.74,23.37 ; v1(120.88,23.37) 120.01,23.37 ; v1(120.88,23.37) 120.88,24.23 ; v1(120.88,23.37) 120.88,22.5 ; v1(37.49,19.71) 38.35,19.71 ; v1(37.49,19.71) 37.49,20.57 ; v1(37.49,19.71) 37.49,18.85 ; v1(37.49,19.71) 36.63,19.71 ; Y2.3 103.76,9.22 103.76,10.94 ; Y2.3 104.01,7.85 C9.2 ; Y2.3 101.22,8.41 ; Y2.3 104.57,6.83 ; Y2.3 104.57,9.98 ; Y2.3 107.92,8.41 ; 25.37,10.9 v1(25.37,11.76) ; v1(25.37,11.76) 24.51,11.76 ; v1(25.37,11.76) 26.24,11.76 ; 105.69,22.45 D7.1 107.47,24.1 ; 86.72,59.87 C15.1 87.73,58.88 ; 76.45,37.69 v1(76.45,38.56) 77.32,38.56 ; 48.35,26.62 U7.1 47.24,28.11 ; C4.2 37.41,8.89 ; C4.2 37.41,6.86 ; C4.2 36.42,7.87 ; v1(14.81,20.78) 14.81,21.64 ; v1(14.81,20.78) 13.94,20.78 ; v1(14.81,20.78) 14.81,19.91 ; v1(14.81,20.78) 15.67,20.78 ; 39.29,10.24 v1(39.29,9.37) 40.16,9.37 ; 114.83,13.21 v1(115.7,13.21) ; v1(115.7,13.21) 115.7,12.34 ; v1(115.7,13.21) 116.56,13.21 ; v1(115.7,13.21) 115.7,14.07 ; v1(104.19,59.72) 105.05,59.72 ; v1(104.19,59.72) 103.33,59.72 ; v1(104.19,59.72) 104.19,58.85 ; v1(104.19,59.72) 104.19,60.58 ; 53.24,8.03 v1(54.1,8.03) ; v1(48.46,10.97) 49.33,10.97 ; v1(48.46,10.97) 47.6,10.97 ; v1(48.46,10.97) 48.46,10.11 ; v1(48.46,10.97) 48.46,11.84 ; 53.21,9.58 v1(54.08,9.58) ; 32.07,37.97 L9.2 31.18,36.98 ; 115.77,19.35 BAT.2 ; BAT.2 117.81,21.64 ; BAT.2 115.77,23.93 ; 93.07,4.17 GPRS.7 ; GPRS.7 94.34,2.9 ; GPRS.7 94.34,5.44 ; GPRS.7 95.61,4.17 ; v1(59.77,50.83) 59.77,51.69 ; 90.32,55.14 v1(90.32,56.01) 90.32,56.87 ; 51.66,50.75 v1(51.66,51.61) ; 103.89,10.57 C10.2 104.88,11.58 ; 65.23,21.28 v1(65.23,22.15) ; v1(65.23,22.15) 66.09,22.15 ; v1(65.23,22.15) 65.23,23.01 ; 96.19,32.39 v1(96.19,31.52) 95.33,31.52 ; v1(121.13,27.86) 122,27.86 ; v1(121.13,27.86) 121.13,28.73 ; v1(121.13,27.86) 120.27,27.86 ; v1(121.13,27.86) 121.13,27 ; 84.81,34.01 C29.2 ; C29.2 86.08,35.28 ; C29.2 83.54,35.28 ; C29.2 84.81,36.55 ; DC_12.2 5.82,4.42 ; DC_12.2 5.82,1.88 ; DC_12.2 7.09,3.15 ; 26.92,0.91 v1(27.79,0.91) ; v1(27.79,0.91) 27.79,1.78 ; v1(27.79,0.91) 28.65,0.91 ; v1(4.85,11.56) 4.85,12.42 ; v1(4.85,11.56) 4.85,10.69 ; v1(4.85,11.56) 3.99,11.56 ; v1(4.85,11.56) 5.72,11.56 ; 1.27,11.2 v1(1.27,12.07) ; v1(1.27,12.07) 1.27,12.93 ; v1(1.27,12.07) 2.13,12.07 ; 110.95,18.85 v1(111.81,18.85) ; v1(111.81,18.85) 112.67,18.85 ; v1(111.81,18.85) 111.81,17.98 ; v1(78.31,48.79) 79.17,48.79 ; v1(78.31,48.79) 78.31,49.66 ; v1(78.31,48.79) 77.44,48.79 ; GPRS.6 122.99,5.44 ; GPRS.6 122.99,2.9 ; GPRS.6 124.26,4.17 ; 44.32,20.6 v1(44.32,21.46) ; v1(44.32,21.46) 45.19,21.46 ; v1(44.32,21.46) 44.32,22.33 ; 35.97,26.24 v1(35.97,27.1) 35.97,27.97 ; 45.64,50.6 v1(45.64,49.73) 45.64,48.87 ; 95,62.92 v1(95,62.05) 95,61.19 ; 79.71,0.94 v1(80.57,0.94) ; v1(80.57,0.94) C7.2 ; v1(80.57,0.94) 81.43,0.94 ; 83.72,60.3 v1(83.72,61.16) ; v1(80.57,26.85) 81.43,26.85 ; v1(80.57,26.85) 80.57,27.71 ; v1(80.57,26.85) 79.71,26.85 ; v1(80.57,26.85) 80.57,25.98 ; 64.69,26.8 v1(65.56,26.8) ; v1(65.56,26.8) 66.42,26.8 ; v1(65.56,26.8) 65.56,25.93 ; v1(65.56,26.8) 65.56,27.66 ; 33.45,21.34 C47.1 ; C47.1 34.77,21.03 34.77,20.14 ; C47.1 35.48,21.34 ; C47.1 34.47,20.35 ; 1.3,5.87 v1(1.3,6.73) 2.16,6.73 ; 75.39,30.78 v1(76.26,30.78) 77.12,30.78 ; 96.27,26.62 v1(96.27,27.48) ; v1(96.27,27.48) 96.27,28.35 ; v1(96.27,27.48) 97.13,27.48 ; v1(97.99,4.17) 97.99,5.03 ; v1(97.99,4.17) 97.13,4.17 ; v1(97.99,4.17) 97.99,3.3 ; 42.88,41.15 v1(42.01,41.15) 42.01,42.01 ; 90.68,57.1 v1(90.68,57.96) ; v1(39.52,41.15) 39.52,42.01 ; 96.19,61.19 v1(96.19,62.05) 96.19,62.92 ; 81.27,61.19 v2(82.22,61.19) 82.22,60.24 ; 70.33,20.32 v1(71.2,20.32) 71.2,21.18 ; 40.51,62.66 DEBUG_STM8.1 ; DEBUG_STM8.1 41.78,63.93 ; DEBUG_STM8.1 41.78,61.39 ; 92.3,10.67 HT1.4 ; 122.89,48.16 v1(123.75,48.16) ; 75.71,62.67 J9.4 ; J9.4 75.72,63.93 ; J9.4 76.99,62.66 ; 105.16,45.82 U8.6 ; U8.6 116.33,45.82 ; U8.6 110.74,40.23 ; 56.85,35.32 U13.1 55.89,34.37 ; 33.32,28.24 v1(33.32,27.38) 33.32,26.52 ; v1(27.33,24.56) 28.19,24.56 ; v1(27.33,24.56) 26.47,24.56 ; v1(27.33,24.56) 27.33,25.43 ; 122.89,47.09 v1(123.75,47.09) ; 39.09,44.4 v1(39.09,45.26) ; 104.01,4.11 C9.2 ; C9.2 104.03,5.12 104.03,4.55 103.64,4.17 102.34,4.17 ; C9.2 105,5.13 ; 66.19,22.61 C5.2 66.19,24.64 ; 30.35,39.07 v1(31.22,39.07) 32.08,39.07 ; 44.32,49.63 C25.1 ; 119.99,57.51 C28.1 120.98,58.52 ; 98.98,25.81 v1(98.98,26.67) ; v1(98.98,26.67) 98.12,26.67 ; v1(98.98,26.67) 99.85,26.67 ; 101.4,43.33 v1(102.26,43.33) ; v1(102.26,43.33) 102.26,42.47 ; v1(102.26,43.33) 102.26,44.2 ; v1(76.16,32.87) 77.02,32.87 ; v1(76.16,32.87) 76.16,33.73 ; v1(76.16,32.87) 75.29,32.87 ; 15.01,8.31 C1.2 ; 110.95,24.08 v1(111.81,24.08) 112.67,24.08 ; U10.2 16.26,28.79 ; U10.2 19.82,25.29 ; U10.2 16.26,21.8 ; 52.45,31.98 v1(53.31,31.98) ; v1(53.31,31.98) 54.18,31.98 ; v1(53.31,31.98) 53.31,31.11 ; 35.26,9.17 v1(36.12,9.17) ; v1(36.12,9.17) 36.12,8.31 ; v1(36.12,9.17) 36.98,9.17 ; 36.02,17.37 v1(36.88,17.37) ; 70.6,30.71 v1(71.46,30.71) ; v1(71.46,30.71) 71.46,29.84 ; v1(71.46,30.71) 72.32,30.71 ; C35.1 54.79,31.88 ; C17.1 79.27,39.67 ; C7.2 81.58,4.47 ; C7.2 79.55,4.47 ; 60.68,0.7 LED_POW2.2 59.6,1.78 ; 58.06,49.96 v1(58.06,50.83) 57.2,50.83 ; v1(13.21,9.32) 13.21,10.19 ; v1(13.21,9.32) 13.21,8.46 ; v1(13.21,9.32) 12.34,9.32 ; 90.25,23.09 v1(91.11,23.09) ; v1(91.11,23.09) 91.97,23.09 ; v1(91.11,23.09) 91.11,23.95 ; v1(91.11,23.09) 91.11,22.22 ; 0.89,9.22 D1.1 4.19,9.22 ; 29.36,7.32 v1(28.5,7.32) 28.5,8.18 ; 51.51,36.22 C37.2 52.5,35.2 ; 87.9,37.96 v1(88.76,37.96) 89.62,37.96 ; 37.64,38.56 v1(36.78,38.56) 36.78,39.42 ; 101.19,54.28 v1(101.19,55.14) 101.19,56.01 ; 74.19,37.69 v1(74.19,38.56) ; 46.48,28.83 v1(46.48,29.69) 47.35,29.69 ; U11.6 114.48,31.52 ; U11.6 108.89,25.93 ; U11.6 108.89,37.11 ; v1(45.16,33.27) 46.02,33.27 ; v1(45.16,33.27) 44.3,33.27 ; v1(45.16,33.27) 45.16,34.14 ; v1(45.16,33.27) 45.16,32.41 ; 71.69,37.72 v1(71.69,36.85) 72.55,36.85 ; 104.24,56.77 C41.2 105.23,57.79 ; 28.55,25.76 v1(28.55,26.62) ; U2.4 22.15,3.15 ; v1(11.25,20.32) 12.12,20.32 ; v1(11.25,20.32) 11.25,19.46 ; v1(11.25,20.32) 10.39,20.32 ; 31.01,32.38 v1(31.01,33.25) 31.88,33.25 ; v1(60.87,13.69) 61.73,13.69 ; R4.1 47.21,9.98 ; 2.06,1.07 v1(1.19,1.07) 1.19,1.93 ; 43.38,45.59 v1(42.51,45.59) 41.65,45.59 ; 51.79,22.9 Q6.2 50.77,21.69 ; 72.47,23.13 R60.2 73.46,22.24 ; 80.65,34.32 C8.2 79.65,33.3 ; v1(71.04,34.93) 71.91,34.93 ; v1(120.7,33.81) 120.7,34.67 ; v1(120.7,33.81) 119.84,33.81 ; v1(120.7,33.81) 121.56,33.81 ; v1(120.7,33.81) 120.7,32.94 ; 48.51,21.68 R42.1 49.5,20.79 ; 107.29,59.56 C42.1 106.3,58.55 ; 84.28,59.89 C27.1 83.26,58.9 ; 54.94,63.93 USART1.1 53.67,62.66 ; 47.14,48.87 v1(47.14,49.73) ; C43.2 114.33,58.6 ; 122.89,46.08 v1(123.75,46.08) 123.75,45.21 ; 96.16,11.2 v1(95.3,11.2) 95.3,11.05 94.92,10.67 ; 64.72,23.57 C6.2 63.73,24.59 ; 37.57,22.76 v1(37.57,23.62) ; v1(37.57,23.62) 38.43,23.62 ; v1(37.57,23.62) 36.7,23.62 ; 54.27,5.35 R50.2 ; 56.92,31.78 C34.2 55.91,30.78 ; 57.99,56.82 DEBUG_STM32.1 59.26,55.55 ; 7.11,1.32 v1(7.98,1.32) 7.98,2.18 ; v1(93.52,60.3) 94.39,60.3 ; 123.67,50.77 C38.2 121.97,52.37 ; C19.2 55.55,53.49 ; U4.4 76.01,51.38 ; R5.2 27.62,9.35 ; C12.1 79.27,47.09 ; v1(47.24,23.55) 48.11,23.55 ; 101.52,51.64 C39.2 ; 39.98,20.47 C45.1 ; 54.1,12.4 C11.1 ; v1(63.5,51.38) 63.5,52.25 ; 28.88,33.31 L3.1 ; Q4.2 47.16,57.51 ; C2.2 46.38,12.88 ; C46.2 34.42,28.4 ; C33.1 35.05,36.42 ; C55.2 85.93,27.13 ; C55.2 84.66,28.4 ; C55.2 83.39,27.13 ; GPRS.1 115.11,62.79 ; 92.71,11.84 v1(93.57,11.84) ; 42.39,20.47 C44.2 ; v1(58.8,37.41) 58.8,38.28 ; C18.1 72.21,33.58 ; 39.32,17.4 v1(40.18,17.4) 41.05,17.4 ; 74,49.85 v1(74.87,49.85) ; 43.74,29.18 C36.1 ; 75.84,22.24 R61.2 ; 73.15,49.81 v1(73.15,50.67)
  TOP w0.508: v1(31.22,39.07) 31.18,39.03 L9.2 ; v1(111.81,18.85) 111.81,21.59 ; 111.81,21.59 v1(111.81,24.08) ; 111.81,21.59 111.86,21.64 BAT.2 ; 70.82,23.07 70.79,23.03 70.79,20.73 v1(71.2,20.32) 69.72,18.85 STM32_LED1.2 ; U11.3 v1(96.19,31.52) ; v1(83.72,61.16) 84.02,60.86 84.02,59.16 C27.1 86.69,58.9 C15.1 86.77,58.83 C16.1 89.82,58.83 v1(90.68,57.96) ; U11.5 v1(98.98,26.67)
  TOP w0.635: C23.1 40.97,35.69 40.34,36.32 36.98,36.32 36.78,36.12 ; C33.1 36.07,35.41 36.78,36.12 ; 36.78,36.12 v1(36.78,38.56) 35.41,38.56 33.45,40.51 STM8_LED1.2 ; v1(37.57,23.62) 39.73,21.46 C45.1
  TOP w0.762: v1(44.32,21.46) C44.2 C45.1 40.18,21.26 v1(40.18,17.4) ; DEBUG_STM8.1 41.99,62.46 41.99,62.13 45.95,58.17 Q4.2 ; U7.1 v1(47.24,23.55) ; v1(28.55,26.62) 29.31,27.38 C52.1 ; C46.2 35.94,27.41 36.47,26.87 37.24,26.87 U9.1
  TOP w1.016: C43.2 113.33,59.31 113.94,59.92 113.84,60.02 GPRS.1 113.84,64.66 114.07,64.89 ; 114.07,64.89 116.45,64.89 120,61.33 120,61.33 120.33,60.35 120.5,60.1 121.64,59.33 122.2,59.24 122.66,58.78 122.66,58.78 123.67,57.76 C38.2 123.75,52.3 v1(123.75,48.16) v1(123.75,47.09) v1(123.75,46.08) ; 114.07,64.89 114.06,64.9 94.11,64.9 93.27,64.06 C40.2 ; D7.1 105.69,28.32 U11.6 ; USART1.1 55,62.72 55,64.06 55.78,64.85 74.69,64.85 75.71,63.83 75.71,62.67 ; v1(97.99,4.17) 99.29,4.17
  BOTTOM w0.254: v1(78.31,48.79) 75.92,46.41 75.92,39.07 76.43,38.56 v1(76.45,38.56) ; v1(78.31,48.79) 80.14,48.79 81.81,47.12 81.81,46.15 83.46,44.5 83.46,38.3 83.9,37.87 88.67,37.87 v1(88.76,37.96) 88.85,37.87 92.71,37.87 93.73,38.89 v1(93.73,40.03) ; v1(78.31,48.79) 77.25,49.85 v1(74.87,49.85) ; 109.8,49.73 v1(109.8,53.37) ; 65.59,14.48 65.18,14.89 ; v1(60.87,13.69) 60.58,13.4 60.58,7.09 56.97,3.48 BAT_8.4V1.2 ; 106.68,43.48 106.32,43.84 106.17,43.84 ; v1(39.52,41.15) 39.37,41.15 v1(36.78,38.56) ; v1(36.12,9.17) 34.26,7.32 v1(28.5,7.32) ; v1(104.19,59.72) 104.17,59.69 101.02,59.69 ; v1(102.26,43.33) 102.77,43.84 105.18,43.84 ; v1(31.01,33.25) 31.01,30.62 33.32,28.31 v1(33.32,27.38) 33.32,19.74 35.69,17.37 v1(36.88,17.37) ; v1(58.8,37.41) 58.88,37.34 60.35,37.34 v1(60.38,37.31) ; v1(54.1,8.03) 54.08,8.05 v1(54.08,9.58) ; v1(48.46,10.97) 46.86,9.37 v1(39.29,9.37) 39.29,14.96 38.4,15.85 ; v1(71.04,34.93) 71.04,36.14 71.73,36.83 71.73,36.85 v1(71.69,36.85) ; v1(71.04,34.93) 71.45,34.52 71.45,30.72 v1(71.46,30.71) ; v1(71.04,34.93) 70.71,34.59 v1(68.73,34.59) ; v1(96.27,27.48) 95.86,27.48 93.57,25.2 v1(93.57,11.84) ; v1(96.19,62.05) 97.94,62.05 100.43,59.56 100.89,59.56 101.02,59.69 ; v1(101.19,55.14) 101.02,55.31 101.02,57.38 ; v1(53.31,31.98) 53.29,31.95 48.74,31.95 v1(46.48,29.69) 46.48,31.95 v1(45.16,33.27) ; v1(1.3,6.73) 2.24,6.73 DC_12.2 ; 101.02,59.69 101.02,57.38 ; v1(49.17,49.5) 47.37,49.5 v1(47.14,49.73) ; v1(76.45,38.56) 76.45,33.17 v1(76.16,32.87) 76.32,32.7 76.32,30.85 v1(76.26,30.78) ; v1(76.45,38.56) 76.43,38.53 74.22,38.53 v1(74.19,38.56) ; v1(90.32,56.01) 90.6,56.29 90.6,57.89 v1(90.68,57.96) ; GPRS.7 94.06,3.89 94.06,0.84 ; v1(31.22,39.07) 31.47,39.07 31.72,39.32 31.72,43.38 30.56,44.55 v1(28.42,44.55) ; v1(24.82,17.63) 25.37,17.07 v1(25.37,11.76) 25.27,11.86 14.58,11.86 13.21,10.49 v1(13.21,9.32) 13.21,4.47 12.42,3.68 ; v1(56.29,48.03) 58.09,49.83 58.09,50.8 v1(58.06,50.83) v1(59.77,50.83) 60.33,51.38 v1(63.5,51.38) ; v1(71.2,20.32) 71.02,20.14 v1(64.67,20.14) ; v1(68.48,58.01) 60.45,58.01 DEBUG_STM32.1 ; 50.5,5.99 50.5,8.94 48.54,10.9 ; v1(18.54,3.15) 18.54,0.94 15.19,0.94 15.11,0.86 ; v1(73.15,50.67) 70.89,50.67 70.61,50.95 70.61,52.27 71.65,53.31 73.33,53.31 76.43,56.41 83.01,56.41 v1(85.55,58.95) ; 6.27,33.63 v1(6.17,33.63) 5.97,33.43 v1(5.97,29.03) ; v1(92.48,57.96) 94.26,57.96 94.84,57.38 101.02,57.38 ; v1(7.98,1.32) 6.15,3.15 ; 96.9,28.12 104.72,28.12 ; v1(51.66,51.61) v1(55.83,51.61)
  BOTTOM w0.305: 105.18,43.84 106.17,43.84 v1(106.81,44.48) ; v1(109.37,41.94) 109.37,36.47 v1(110.39,35.46)
  BOTTOM w0.381: v1(112.95,32.89) 112.95,33.76 ; v1(112.95,32.89) 112.09,32.89 ; v1(112.95,32.89) 112.95,32.03 ; v1(112.95,32.89) 113.82,32.89 ; 24.51,11.76 v1(25.37,11.76) ; v1(25.37,11.76) 25.37,10.9 ; v1(25.37,11.76) 26.24,11.76 ; 63.8,20.14 v1(64.67,20.14) ; v1(64.67,20.14) 64.67,19.28 ; v1(64.67,20.14) 64.67,21.01 ; v1(105.56,10.62) 106.43,10.62 ; v1(105.56,10.62) 104.7,10.62 ; v1(105.56,10.62) 105.56,11.48 ; v1(105.56,10.62) 105.56,9.75 ; v1(105.56,10.62) 105.44,10.74 95.76,10.74 v1(95.3,11.2) ; v1(88.76,37.96) 89.62,37.96 ; v1(88.76,37.96) 88.76,38.82 ; v1(88.76,37.96) 87.9,37.96 ; 122.89,46.08 v1(123.75,46.08) ; v1(37.57,23.62) 38.43,23.62 ; 111.94,41.07 v1(111.94,41.94) ; v1(111.94,41.94) 111.07,41.94 ; v1(111.94,41.94) 112.8,41.94 ; v1(111.94,41.94) 111.94,42.8 ; 97.05,31.52 v1(96.19,31.52) 96.19,30.66 ; 17.12,23.42 v1(17.98,23.42) ; v1(17.98,23.42) 17.98,22.56 ; v1(17.98,23.42) 17.98,24.28 ; v1(17.98,23.42) 18.85,23.42 ; 75.29,32.87 v1(76.16,32.87) ; v1(76.16,32.87) 76.16,33.73 ; v1(76.16,32.87) 76.16,32 ; v1(93.57,11.84) 94.44,11.84 ; v1(93.57,11.84) 93.57,10.97 ; v1(93.57,11.84) 92.71,11.84 ; 28.55,25.76 v1(28.55,26.62) ; v1(28.55,26.62) 29.41,26.62 ; v1(28.55,26.62) 27.69,26.62 ; v1(28.55,26.62) 28.55,27.48 ; 44.3,33.27 v1(45.16,33.27) ; v1(45.16,33.27) 46.02,33.27 ; v1(45.16,33.27) 45.16,32.41 ; v1(95.3,11.2) 96.16,11.2 ; v1(95.3,11.2) 95.3,10.34 ; v1(95.3,11.2) 94.44,11.2 ; v1(95.3,11.2) 95.3,12.07 ; 11.25,19.46 v1(11.25,20.32) ; v1(11.25,20.32) 10.39,20.32 ; v1(11.25,20.32) 12.12,20.32 ; v1(54.1,8.03) 54.97,8.03 ; 109.37,46.18 v1(109.37,47.04) ; v1(109.37,47.04) 109.37,47.9 ; v1(109.37,47.04) 110.24,47.04 ; v1(109.37,47.04) 108.51,47.04 ; v1(114.5,47.04) 115.37,47.04 ; v1(114.5,47.04) 114.5,47.9 ; v1(114.5,47.04) 114.5,46.18 ; v1(114.5,47.04) 113.64,47.04 ; 60.95,4.6 v1(60.95,5.47) 61.82,5.47 ; v1(42.01,41.15) 42.88,41.15 ; v1(42.01,41.15) 42.01,42.01 ; v1(42.01,41.15) 42.01,40.29 ; 113.64,44.48 v1(114.5,44.48) ; v1(114.5,44.48) 115.37,44.48 ; v1(114.5,44.48) 114.5,45.34 ; v1(114.5,44.48) 114.5,43.61 ; 36.12,8.31 v1(36.12,9.17) ; v1(36.12,9.17) 36.12,10.03 ; v1(36.12,9.17) 36.98,9.17 ; v1(36.12,9.17) 35.26,9.17 ; 68.73,33.72 v1(68.73,34.59) ; 40.51,62.66 DEBUG_STM8.1 41.78,61.39 ; v1(111.94,47.04) 111.94,47.9 ; v1(111.94,47.04) 112.8,47.04 ; v1(111.94,47.04) 111.07,47.04 ; v1(111.94,47.04) 111.94,46.18 ; 15.16,25.2 v1(14.3,25.2) 14.3,24.33 ; 35.97,27.97 v1(35.97,27.1) 36.83,27.1 ; v1(109.37,49.61) 110.24,49.61 ; v1(109.37,49.61) 109.37,48.74 ; v1(109.37,49.61) 109.37,50.47 ; v1(109.37,49.61) 108.51,49.61 ; 120.01,23.37 v1(120.88,23.37) ; v1(120.88,23.37) 121.74,23.37 ; v1(120.88,23.37) 120.88,22.5 ; v1(120.88,23.37) 120.88,24.23 ; v1(112.95,30.33) 112.95,31.19 ; v1(112.95,30.33) 112.09,30.33 ; v1(112.95,30.33) 112.95,29.46 ; v1(112.95,30.33) 113.82,30.33 ; 26.47,24.56 v1(27.33,24.56) ; v1(27.33,24.56) 27.33,25.43 ; v1(27.33,24.56) 27.33,23.7 ; v1(27.33,24.56) 28.19,24.56 ; v1(76.45,38.56) 76.45,39.42 ; v1(14.3,23.39) 14.3,24.26 ; v1(14.3,23.39) 14.3,22.53 ; v1(14.3,23.39) 15.16,23.39 ; 16.15,22.58 v1(16.15,23.44) ; v1(16.15,23.44) 17.02,23.44 ; v1(16.15,23.44) 15.29,23.44 ; v1(16.15,23.44) 16.15,24.31 ; 102.26,44.2 v1(102.26,43.33) 102.26,42.47 ; v1(36.78,38.56) 37.64,38.56 ; v1(36.78,38.56) 35.92,38.56 ; v1(36.78,38.56) 36.78,37.69 ; v1(36.78,38.56) 36.78,39.42 ; 105.26,32.03 v1(105.26,32.89) ; v1(105.26,32.89) 106.12,32.89 ; v1(105.26,32.89) 105.26,33.76 ; v1(105.26,32.89) 104.39,32.89 ; 96.19,62.92 v1(96.19,62.05) 96.19,61.19 ; v1(90.32,56.01) 90.32,56.87 ; v1(90.32,56.01) 91.19,56.01 ; v1(90.32,56.01) 90.32,55.14 ; v1(90.32,56.01) 89.46,56.01 ; v1(80.57,0.94) 80.57,1.8 ; v1(80.57,0.94) 81,0.94 81.1,0.84 ; v1(80.57,0.94) 79.71,0.94 ; 113.64,41.94 v1(114.5,41.94) ; v1(114.5,41.94) 114.5,42.8 ; v1(114.5,41.94) 114.5,41.07 ; v1(114.5,41.94) 115.37,41.94 ; 17.2,26.9 v1(18.06,26.9) 18.92,26.9 ; v1(120.7,33.81) 121.56,33.81 ; v1(120.7,33.81) 119.84,33.81 ; v1(120.7,33.81) 120.7,32.94 ; v1(120.7,33.81) 120.7,34.67 ; 45.64,48.87 v1(45.64,49.73) ; v1(45.64,49.73) 44.78,49.73 ; v1(45.64,49.73) 45.64,50.6 ; v1(63.5,51.38) 64.36,51.38 ; 30.35,39.07 v1(31.22,39.07) 31.22,39.93 ; 53.67,62.66 USART1.1 ; USART1.1 54.94,61.39 ; USART1.1 54.94,63.93 ; 57.2,50.83 v1(58.06,50.83) ; v1(58.06,50.83) 58.06,49.96 ; v1(58.06,50.83) 58.06,51.69 ; v1(101.19,55.14) 102.06,55.14 ; v1(101.19,55.14) 101.19,54.28 ; v1(101.19,55.14) 100.33,55.14 ; v1(101.19,55.14) 101.19,56.01 ; 32.46,27.38 v1(33.32,27.38) ; 31.01,34.11 v1(31.01,33.25) 30.15,33.25 ; 103.33,59.72 v1(104.19,59.72) ; v1(104.19,59.72) 104.19,60.58 ; v1(104.19,59.72) 104.19,58.85 ; v1(104.19,59.72) 105.05,59.72 ; v1(107.82,30.33) 107.82,31.19 ; v1(107.82,30.33) 106.96,30.33 ; v1(107.82,30.33) 107.82,29.46 ; v1(107.82,30.33) 108.69,30.33 ; v1(4.85,11.56) 4.85,12.42 ; v1(4.85,11.56) 3.99,11.56 ; v1(4.85,11.56) 4.85,10.69 ; v1(4.85,11.56) 5.72,11.56 ; v1(111.94,49.61) 112.8,49.61 ; v1(111.94,49.61) 111.07,49.61 ; v1(111.94,49.61) 111.94,48.74 ; v1(111.94,49.61) 111.94,50.47 ; v1(74.19,38.56) 75.06,38.56 ; v1(74.19,38.56) 73.33,38.56 ; v1(74.19,38.56) 74.19,37.69 ; v1(18.01,25.2) 18.87,25.2 ; v1(18.01,25.2) 17.14,25.2 ; v1(18.01,25.2) 18.01,24.33 ; 115.11,62.79 GPRS.1 113.84,61.52 ; 111.81,17.98 v1(111.81,18.85) ; v1(111.81,18.85) 111.81,19.71 ; v1(111.81,18.85) 112.67,18.85 ; v1(111.81,18.85) 110.95,18.85 ; v1(65.23,22.15) 65.23,23.01 ; v1(65.23,22.15) 66.09,22.15 ; v1(65.23,22.15) 65.23,21.28 ; 111.07,44.48 v1(111.94,44.48) ; v1(111.94,44.48) 112.8,44.48 ; v1(111.94,44.48) 111.94,45.34 ; v1(111.94,44.48) 111.94,43.61 ; 65.56,25.93 v1(65.56,26.8) ; v1(65.56,26.8) 65.56,27.66 ; v1(65.56,26.8) 66.42,26.8 ; 41.65,45.59 v1(42.51,45.59) ; v1(42.51,45.59) 42.51,44.72 ; v1(42.51,45.59) 43.38,45.59 ; v1(42.51,45.59) 42.51,46.45 ; v1(107.82,32.89) 108.69,32.89 ; v1(107.82,32.89) 107.82,33.76 ; v1(107.82,32.89) 106.96,32.89 ; v1(107.82,32.89) 107.82,32.03 ; v1(71.46,30.71) 71.46,31.57 ; v1(71.46,30.71) 72.32,30.71 ; v1(71.46,30.71) 70.6,30.71 ; 60.38,36.45 v1(60.38,37.31) 61.24,37.31 ; 86.33,61.42 J1.3 ; 60.87,12.83 v1(60.87,13.69) 60.01,13.69 ; 48.11,23.55 v1(47.24,23.55) 46.38,23.55 ; v1(109.8,53.37) 110.67,53.37 ; 1.3,7.59 v1(1.3,6.73) 1.3,5.87 ; 83.39,27.13 C55.2 85.93,27.13 ; 111.81,23.22 v1(111.81,24.08) ; v1(111.81,24.08) 111.81,24.94 ; v1(111.81,24.08) 112.67,24.08 ; v1(111.81,24.08) 110.95,24.08 ; v1(105.18,35.43) 105.18,36.3 ; v1(105.18,35.43) 105.18,34.57 ; v1(105.18,35.43) 106.05,35.43 ; v1(105.18,35.43) 104.32,35.43 ; 15.34,26.85 v1(16.21,26.85) 17.07,26.85 ; 41.38,53.92 v1(41.38,54.79) ; v1(41.38,54.79) 42.24,54.79 ; v1(41.38,54.79) 41.38,55.65 ; v1(41.38,54.79) 40.51,54.79 ; 111.84,27.94 v1(112.7,27.94) ; v1(112.7,27.94) 112.7,28.8 ; v1(112.7,27.94) 112.7,27.08 ; 112.95,34.59 v1(112.95,35.46) ; v1(112.95,35.46) 112.95,36.32 ; v1(112.95,35.46) 112.09,35.46 ; v1(112.95,35.46) 113.82,35.46 ; 38.43,9.37 v1(39.29,9.37) 39.29,8.51 ; 84.68,58.95 v1(85.55,58.95) ; v1(85.55,58.95) 86.41,58.95 ; v1(85.55,58.95) 85.55,58.09 ; 60.63,50.83 v1(59.77,50.83) 59.77,51.69 ; 90.68,57.1 v1(90.68,57.96) ; 92.53,14.2 v1(92.53,15.06) ; v1(92.53,15.06) 91.67,15.06 ; v1(92.53,15.06) 93.4,15.06 ; v1(92.53,15.06) 92.53,15.93 ; 106.96,27.79 v1(107.82,27.79) ; v1(107.82,27.79) 107.82,28.65 ; v1(107.82,27.79) 107.82,26.92 ; v1(107.82,27.79) 108.69,27.79 ; 59.26,55.55 DEBUG_STM32.1 ; DEBUG_STM32.1 57.99,56.82 ; DEBUG_STM32.1 59.26,58.09 ; v1(14.81,20.78) 15.67,20.78 ; v1(14.81,20.78) 14.81,21.64 ; v1(14.81,20.78) 13.94,20.78 ; v1(14.81,20.78) 14.81,19.91 ; v1(37.49,19.71) 38.35,19.71 ; v1(37.49,19.71) 37.49,18.85 ; v1(37.49,19.71) 37.49,20.57 ; v1(37.49,19.71) 36.63,19.71 ; v1(110.39,30.33) 110.39,31.19 ; v1(110.39,30.33) 110.39,29.46 ; v1(110.39,30.33) 109.52,30.33 ; v1(110.39,30.33) 111.25,30.33 ; 104.72,27.1 v1(104.72,27.97) ; v1(104.72,27.97) 103.86,27.97 ; v1(104.72,27.97) 105.59,27.97 ; v1(53.31,31.98) 54.18,31.98 ; v1(53.31,31.98) 52.45,31.98 ; v1(53.31,31.98) 53.31,32.84 ; v1(109.37,44.48) 110.24,44.48 ; v1(109.37,44.48) 108.51,44.48 ; v1(109.37,44.48) 109.37,43.61 ; v1(109.37,44.48) 109.37,45.34 ; v1(97.99,4.17) 98.86,4.17 ; v1(97.99,4.17) 97.99,3.3 ; v1(97.99,4.17) 97.99,5.03 ; 120.27,27.86 v1(121.13,27.86) ; v1(121.13,27.86) 121.13,27 ; v1(121.13,27.86) 122,27.86 ; v1(121.13,27.86) 121.13,28.73 ; 94.06,0.84 94.34,1.12 GPRS.7 ; 98.12,26.67 v1(98.98,26.67) ; v1(98.98,26.67) 98.98,27.53 ; v1(98.98,26.67) 98.98,25.81 ; v1(98.98,26.67) 99.85,26.67 ; v1(78.31,48.79) 78.31,49.66 ; v1(78.31,48.79) 78.31,47.93 ; v1(78.31,48.79) 77.44,48.79 ; v1(93.52,60.3) 93.52,61.16 ; v1(93.52,60.3) 92.66,60.3 ; v1(93.52,60.3) 94.39,60.3 ; v1(48.46,10.97) 49.33,10.97 ; v1(48.46,10.97) 48.46,10.11 ; v1(48.46,10.97) 47.6,10.97 ; 43.46,21.46 v1(44.32,21.46) ; v1(44.32,21.46) 44.32,22.33 ; v1(44.32,21.46) 44.32,20.6 ; 122.99,5.44 GPRS.6 124.26,4.17 ; LED_POW2.2 60.68,2.86 ; LED_POW2.2 61.76,1.78 ; LED_POW2.2 60.68,0.7 ; 74.87,48.98 v1(74.87,49.85) ; 106.81,43.61 v1(106.81,44.48) ; v1(106.81,44.48) 105.94,44.48 ; v1(106.81,44.48) 107.67,44.48 ; v1(106.81,44.48) 106.81,45.34 ; 55.89,34.37 U13.1 ; 1.27,11.2 v1(1.27,12.07) ; v1(1.27,12.07) 2.13,12.07 ; v1(1.27,12.07) 1.27,12.93 ; v1(107.82,35.46) 107.82,36.32 ; v1(107.82,35.46) 107.82,34.59 ; v1(107.82,35.46) 106.96,35.46 ; v1(107.82,35.46) 108.69,35.46 ; 24.82,16.76 v1(24.82,17.63) ; v1(24.82,17.63) 24.82,18.49 ; v1(24.82,17.63) 23.95,17.63 ; v1(24.82,17.63) 25.68,17.63 ; 105.26,29.46 v1(105.26,30.33) ; v1(105.26,30.33) 106.12,30.33 ; v1(105.26,30.33) 104.39,30.33 ; v1(105.26,30.33) 105.26,31.19 ; v1(14.3,26.85) 15.16,26.85 ; 80.57,25.98 v1(80.57,26.85) ; v1(80.57,26.85) 81.43,26.85 ; v1(80.57,26.85) 80.57,27.71 ; 105.94,41.94 v1(106.81,41.94) ; v1(106.81,41.94) 106.81,42.8 ; v1(106.81,41.94) 106.81,41.07 ; v1(106.81,41.94) 107.67,41.94 ; 95,61.19 v1(95,62.05) ; v1(95,62.05) 94.13,62.05 ; v1(95,62.05) 95,62.92 ; v1(115.7,13.21) 116.56,13.21 ; v1(115.7,13.21) 115.7,14.07 ; v1(115.7,13.21) 115.7,12.34 ; v1(115.7,13.21) 114.83,13.21 ; v1(47.14,49.73) 48.01,49.73 ; v1(47.14,49.73) 47.14,50.6 ; v1(47.14,49.73) 47.14,48.87 ; v1(114.5,49.61) 114.5,50.47 ; v1(114.5,49.61) 113.64,49.61 ; v1(114.5,49.61) 114.5,48.74 ; v1(114.5,49.61) 115.37,49.61 ; 122.89,48.16 v1(123.75,48.16) 123.75,49.02 ; 70.82,36.85 v1(71.69,36.85) ; GPRS.7 94.34,5.44 ; GPRS.7 93.07,4.17 ; 19.41,3.15 v1(18.54,3.15) 17.68,3.15 ; v1(91.11,23.09) 91.97,23.09 ; v1(91.11,23.09) 91.11,23.95 ; v1(91.11,23.09) 90.25,23.09 ; v1(91.11,23.09) 91.11,22.22 ; 50.5,2.21 BAT_8.4V1.2 ; 105.94,47.04 v1(106.81,47.04) ; v1(106.81,47.04) 107.67,47.04 ; v1(106.81,47.04) 106.81,47.9 ; v1(106.81,47.04) 106.81,46.18 ; v1(110.39,35.46) 111.25,35.46 ; v1(110.39,35.46) 109.52,35.46 ; v1(110.39,35.46) 110.39,34.59 ; v1(110.39,35.46) 110.39,36.32 ; v1(110.39,27.79) 111.25,27.79 ; v1(110.39,27.79) 109.52,27.79 ; v1(110.39,27.79) 110.39,28.65 ; v1(110.39,27.79) 110.39,26.92 ; v1(27.79,0.91) 28.65,0.91 ; v1(27.79,0.91) 27.79,1.78 ; v1(27.79,0.91) 26.92,0.91 ; 39.09,44.4 v1(39.09,45.26) ; v1(39.09,45.26) 39.09,46.13 ; v1(39.09,45.26) 38.23,45.26 ; v1(106.81,49.61) 106.81,50.47 ; v1(106.81,49.61) 107.67,49.61 ; v1(106.81,49.61) 106.81,48.74 ; v1(106.81,49.61) 105.94,49.61 ; 70.33,20.32 v1(71.2,20.32) ; v1(71.2,20.32) 71.2,19.46 ; v1(71.2,20.32) 71.2,21.18 ; v1(46.48,29.69) 47.35,29.69 ; v1(46.48,29.69) 46.48,28.83 ; v1(46.48,29.69) 45.62,29.69 ; v1(71.04,34.93) 71.91,34.93 ; v1(71.04,34.93) 71.04,34.06 ; v1(71.04,34.93) 70.18,34.93 ; 110.39,32.03 v1(110.39,32.89) ; v1(110.39,32.89) 110.39,33.76 ; v1(110.39,32.89) 111.25,32.89 ; v1(110.39,32.89) 109.52,32.89 ; v1(109.37,41.94) 110.24,41.94 ; v1(109.37,41.94) 109.37,42.8 ; v1(109.37,41.94) 108.51,41.94 ; v1(96.27,27.48) 96.27,28.35 ; v1(96.27,27.48) 97.13,27.48 ; v1(96.27,27.48) 96.27,26.62 ; 5.82,1.88 DC_12.2 5.82,4.42 ; 1.19,1.93 v1(1.19,1.07) 2.06,1.07 ; 12.34,9.32 v1(13.21,9.32) 14.07,9.32 ; J9.4 76.99,62.66 ; v1(36.88,17.37) 37.74,17.37 ; v1(36.88,17.37) 36.88,18.24 ; v1(36.88,17.37) 36.88,16.51 ; 49.17,48.64 v1(49.17,49.5) 49.17,50.37 ; 75.39,30.78 v1(76.26,30.78) 76.26,31.65 ; 39.52,42.01 v1(39.52,41.15) 39.52,40.29 ; 68.48,57.15 v1(68.48,58.01) 68.48,58.88 ; 82.22,60.24 v2(82.22,61.19) ; 122.89,47.09 v1(123.75,47.09) ; 16.15,24.36 v1(16.15,25.22) ; v1(16.15,25.22) 15.29,25.22 ; v1(16.15,25.22) 17.02,25.22 ; 7.98,2.18 v1(7.98,1.32) 7.11,1.32 ; 39.32,17.4 v1(40.18,17.4) ; v1(54.08,9.58) 54.94,9.58 ; 96.16,4.17 96.16,0.97 96.04,0.84 ; 28.5,8.18 v1(28.5,7.32) 27.64,7.32 ; 58.8,36.55 v1(58.8,37.41) ; 93.73,40.89 v1(93.73,40.03) 94.59,40.03 ; 84.81,34.01 C29.2 86.08,35.28
  BOTTOM w0.508: v1(83.72,61.16) 83.57,61.16 83.46,61.06 82.35,61.06 v2(82.22,61.19) ; v1(83.72,61.16) 83.69,61.19 v2(82.22,61.19) ; v1(83.72,61.16) 84.28,61.16 84.3,61.19 84.91,61.19 85.42,61.7 85.42,61.77 J1.3 ; v2(82.22,61.19) 80.25,61.19 78.59,62.85 75.91,62.85 J9.4 75.67,62.62 75.56,62.62 ; LED_POW2.2 60.55,1.78 59.7,2.63 ; v1(71.2,20.32) 74.52,20.32 75.23,19.61 75.23,14.12 74.11,13 72.05,13
  BOTTOM w0.635: v1(37.57,23.62) 37.57,23.95 35.97,25.55 v1(35.97,27.1)
  BOTTOM w0.762: 40.06,15.85 40.18,15.98 v1(40.18,17.4) ; 40.06,15.85 47.02,15.85 48.46,14.4 v1(48.46,10.97) 48.54,10.9 48.54,7.95 50.5,5.99 BAT_8.4V1.2 ; 40.06,15.85 38.4,15.85 v1(36.88,17.37) ; v1(14.3,23.39) 13.11,22.2 11.73,22.2 11.13,21.59 11.13,8.2 6.07,3.15 ; v1(47.24,23.55) 47.24,23.37 45.34,21.46 v1(44.32,21.46) ; GPS1.1 28.63,64.34 29.36,65.07 41.52,65.07 41.78,64.81
  BOTTOM w1.016: C55.2 84.66,26.72 87.27,24.1 92.89,24.1 v1(96.27,27.48) 96.93,28.14 104.7,28.14 104.72,28.12 v1(104.72,27.97) 104.62,27.86 ; GPRS.7 v1(97.99,4.17) ; 50.44,0.84 57.91,0.84 60.22,3.15 60.23,3.15 60.86,3.77 60.86,3.78 62.59,5.51 62.59,13.41 63.6,14.43 65.54,14.43 65.59,14.48 70.14,14.48 70.14,14.48 70.57,14.48 73.51,11.54 73.51,3.89 76.56,0.84 121.97,0.84 122.99,1.85 GPRS.6 123.75,4.93 v1(123.75,46.08) v1(123.75,47.09) v1(123.75,48.16) ; 50.44,0.84 15.14,0.84 15.11,0.86 15.11,1.09 12.52,3.68 12.42,3.68 11.61,4.5 7.49,4.5 6.15,3.15 DC_12.2 ; 50.44,0.84 50.47,0.87 50.47,3.45 BAT_8.4V1.2 ; USART1.1 54.94,62.83 52.96,64.81 41.78,64.81 DEBUG_STM8.1
  BOTTOM w1.524: C55.2 84.66,27.25 85.01,27.61 85.01,35.08 C29.2 ; v1(112.7,27.94) 123.75,27.94
